# Altium PCB OLD-motordriver-v6.2.PcbDoc (part 1 of 2)
Units mil, origin at the board's own origin, x right, y up, seen from the top; angles counter-clockwise.
Board outline 3153.75 x 2790 mil, 4 copper layers (TOP, GND, POWER, BOT), stack 23.756 mil thick; 192 components, 82 nets, 493 pads, 611 vias.
Unrouted connection lines stored in the file: 13.
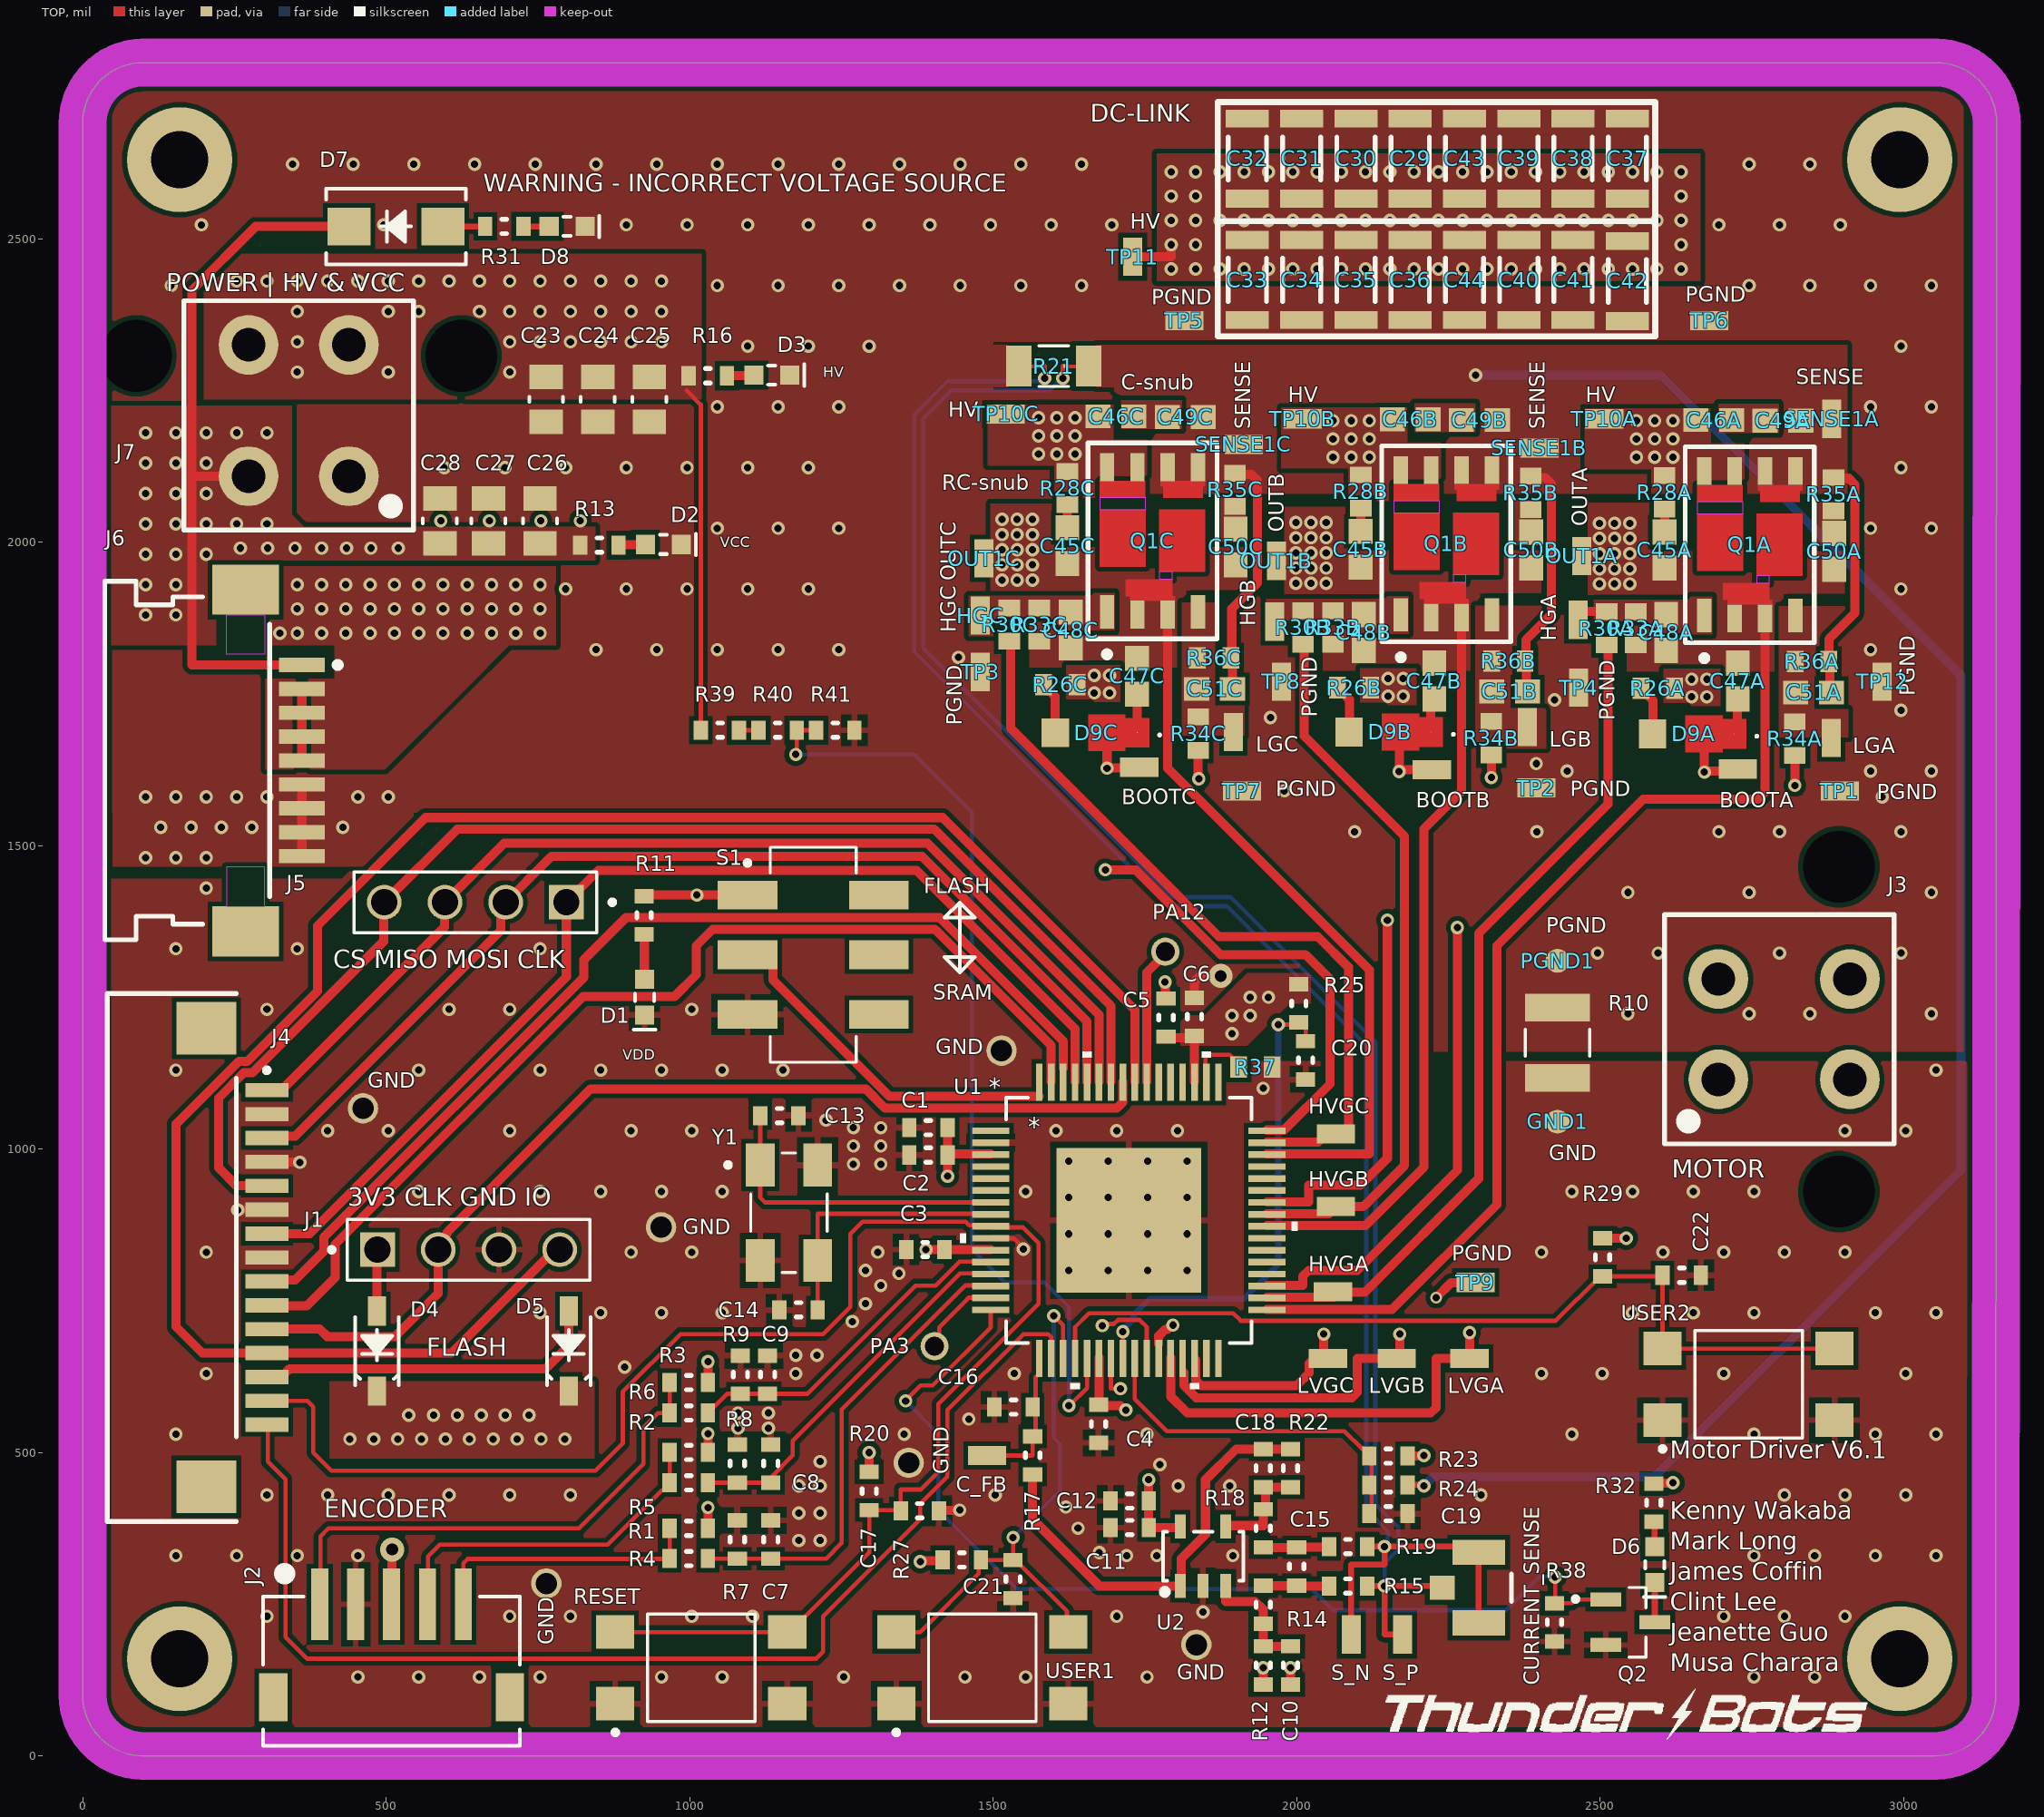
[diagram p0: TOP view]
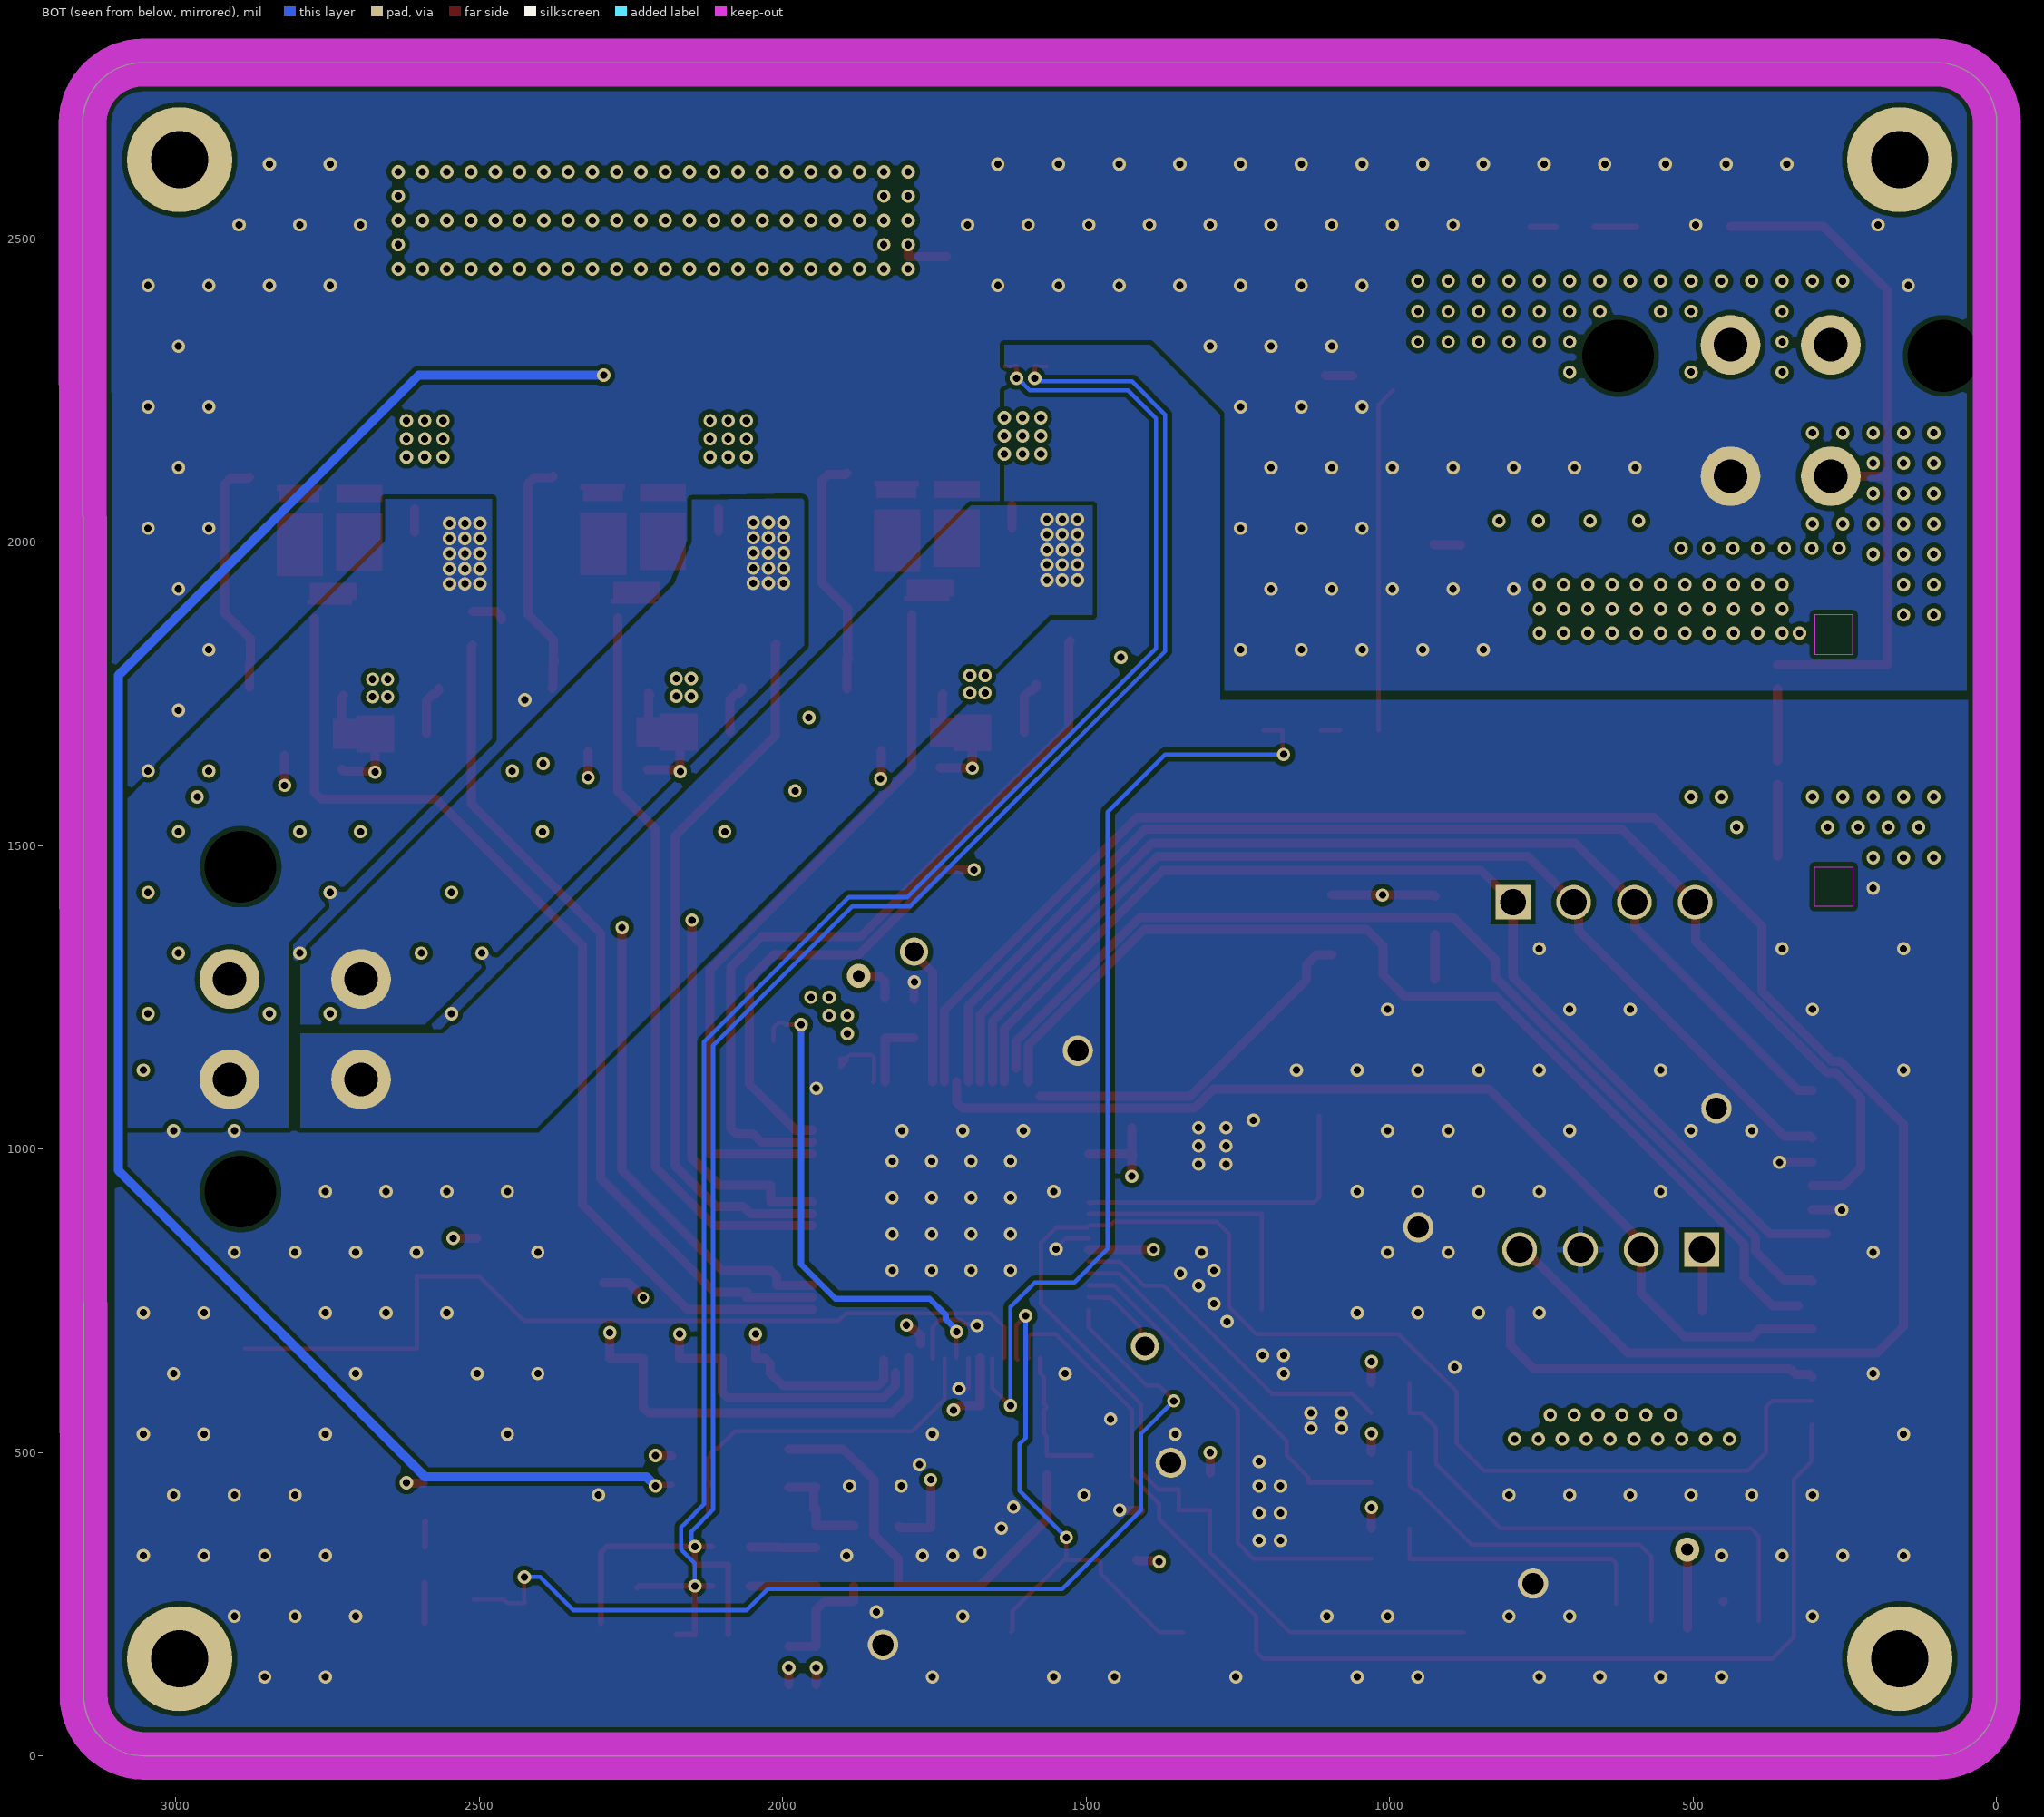
[diagram p1: BOT view, seen from below]
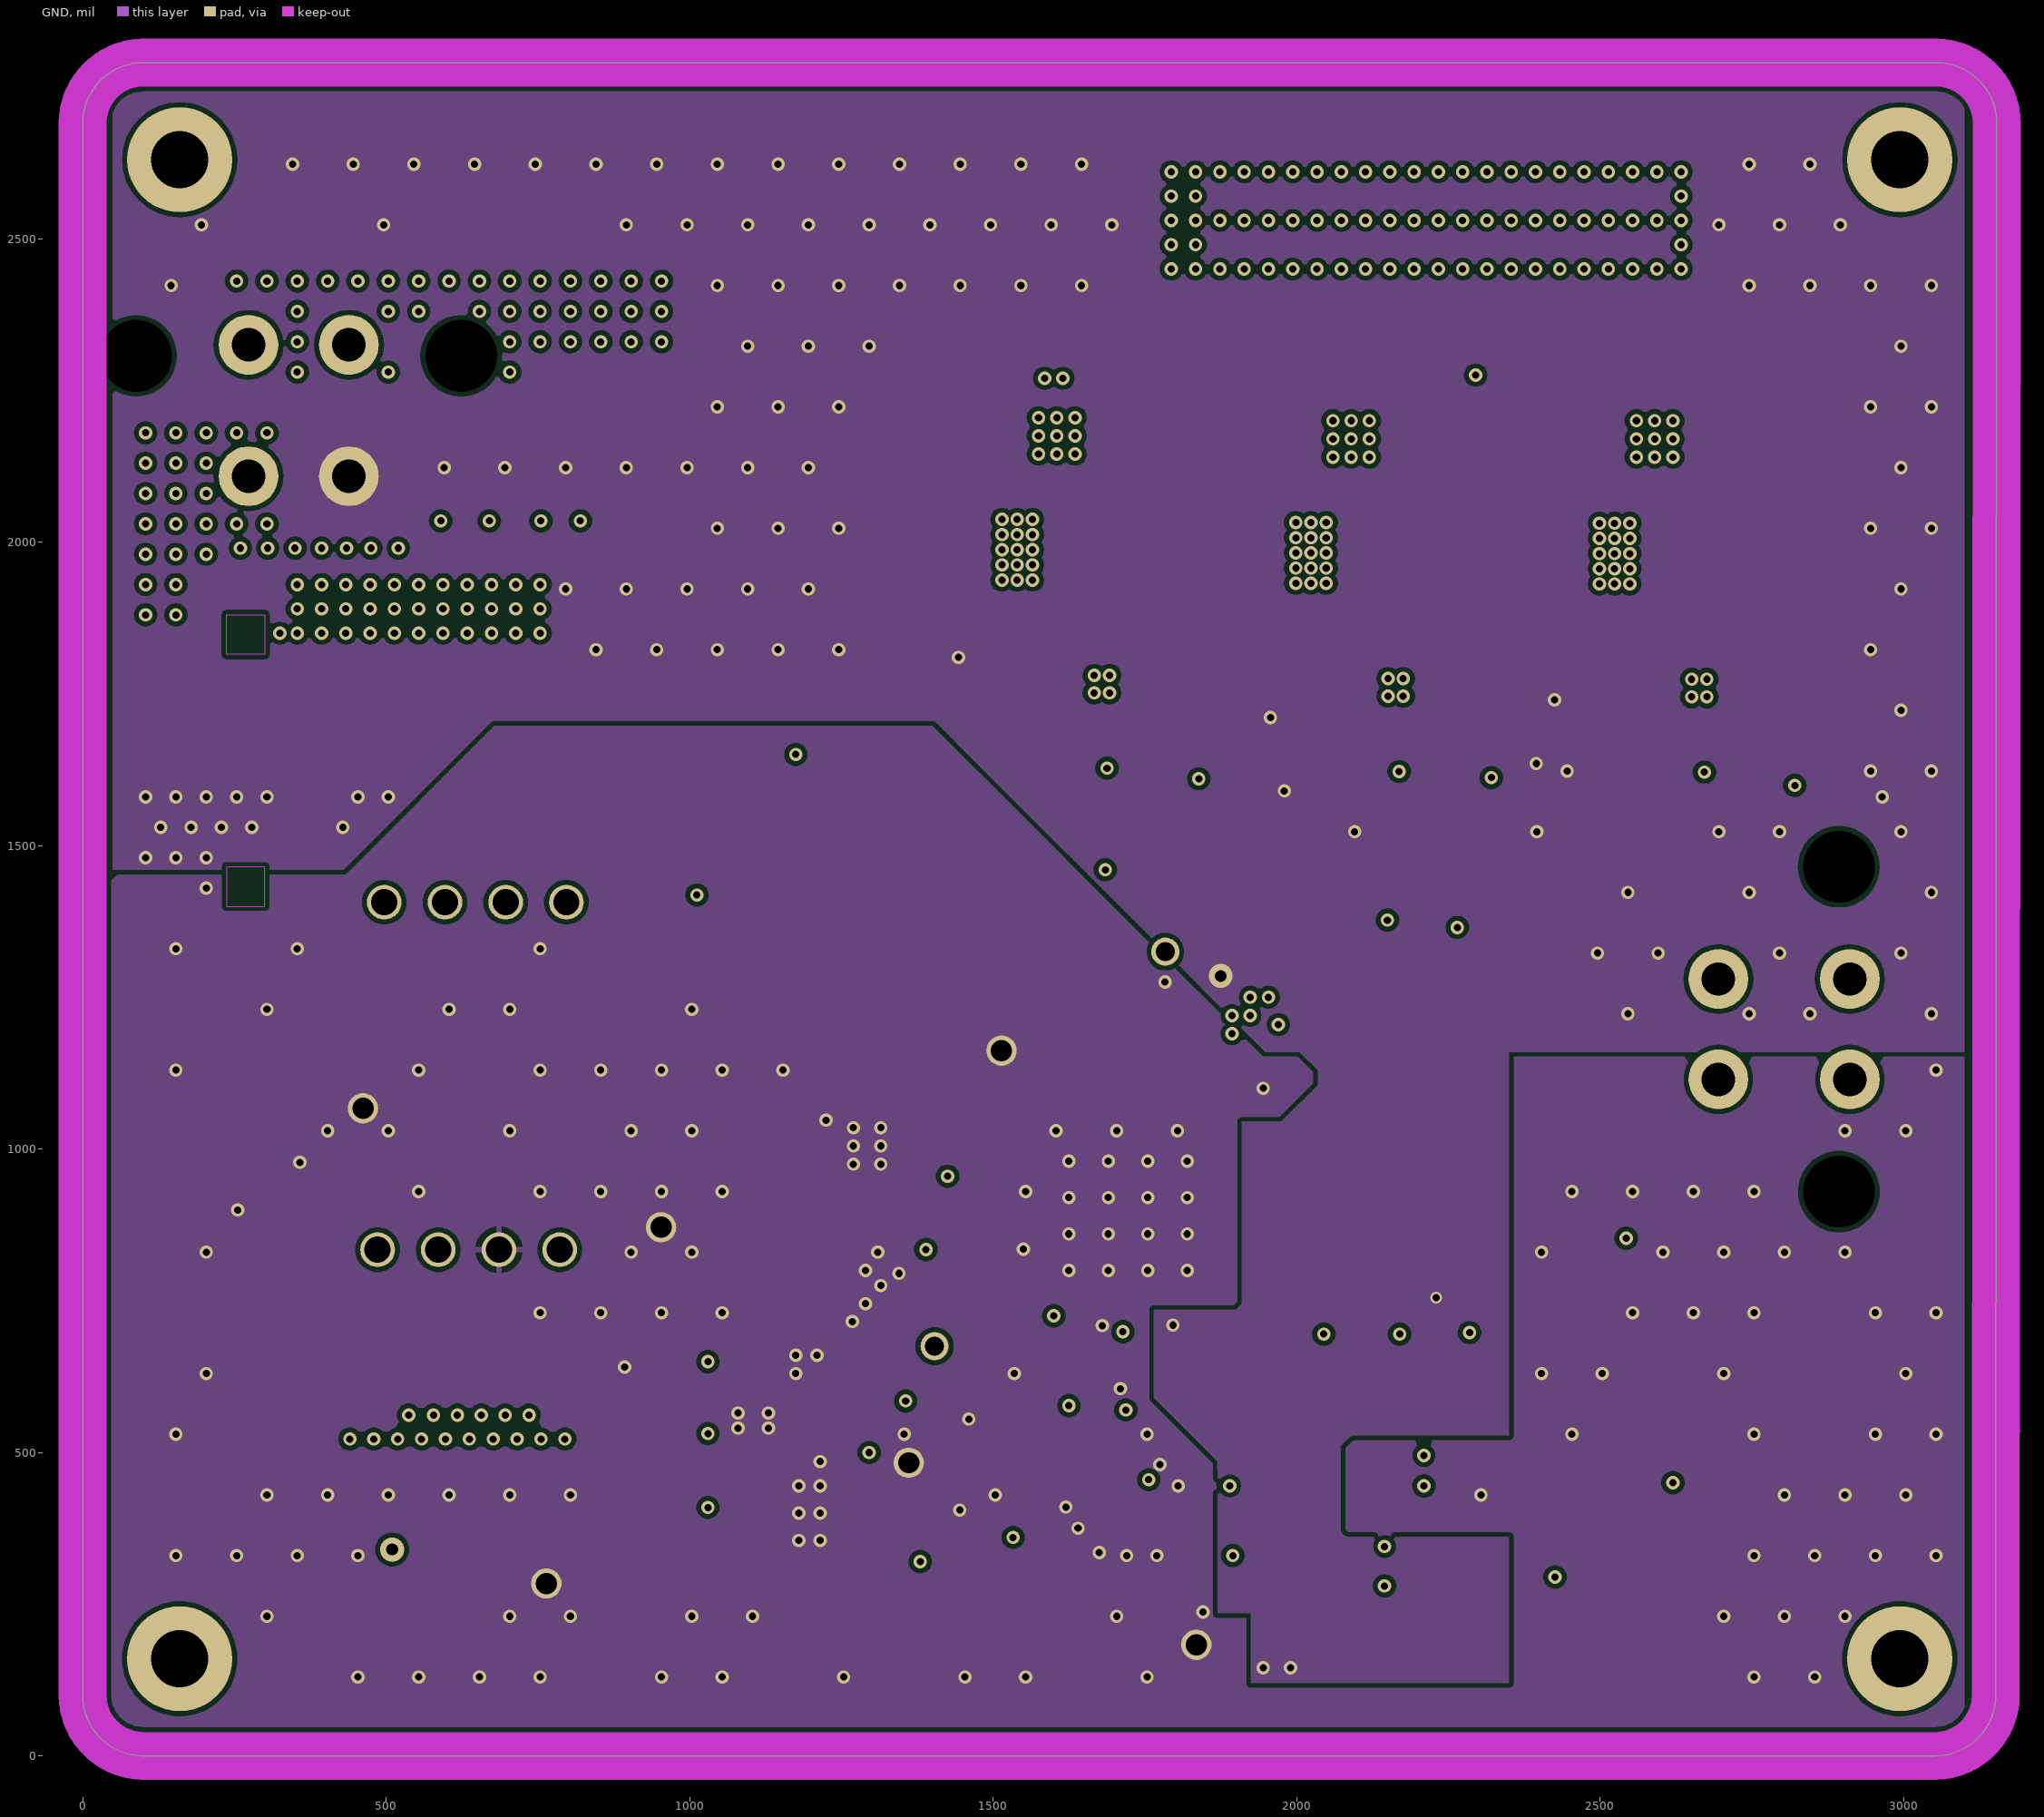
[diagram p2: GND]
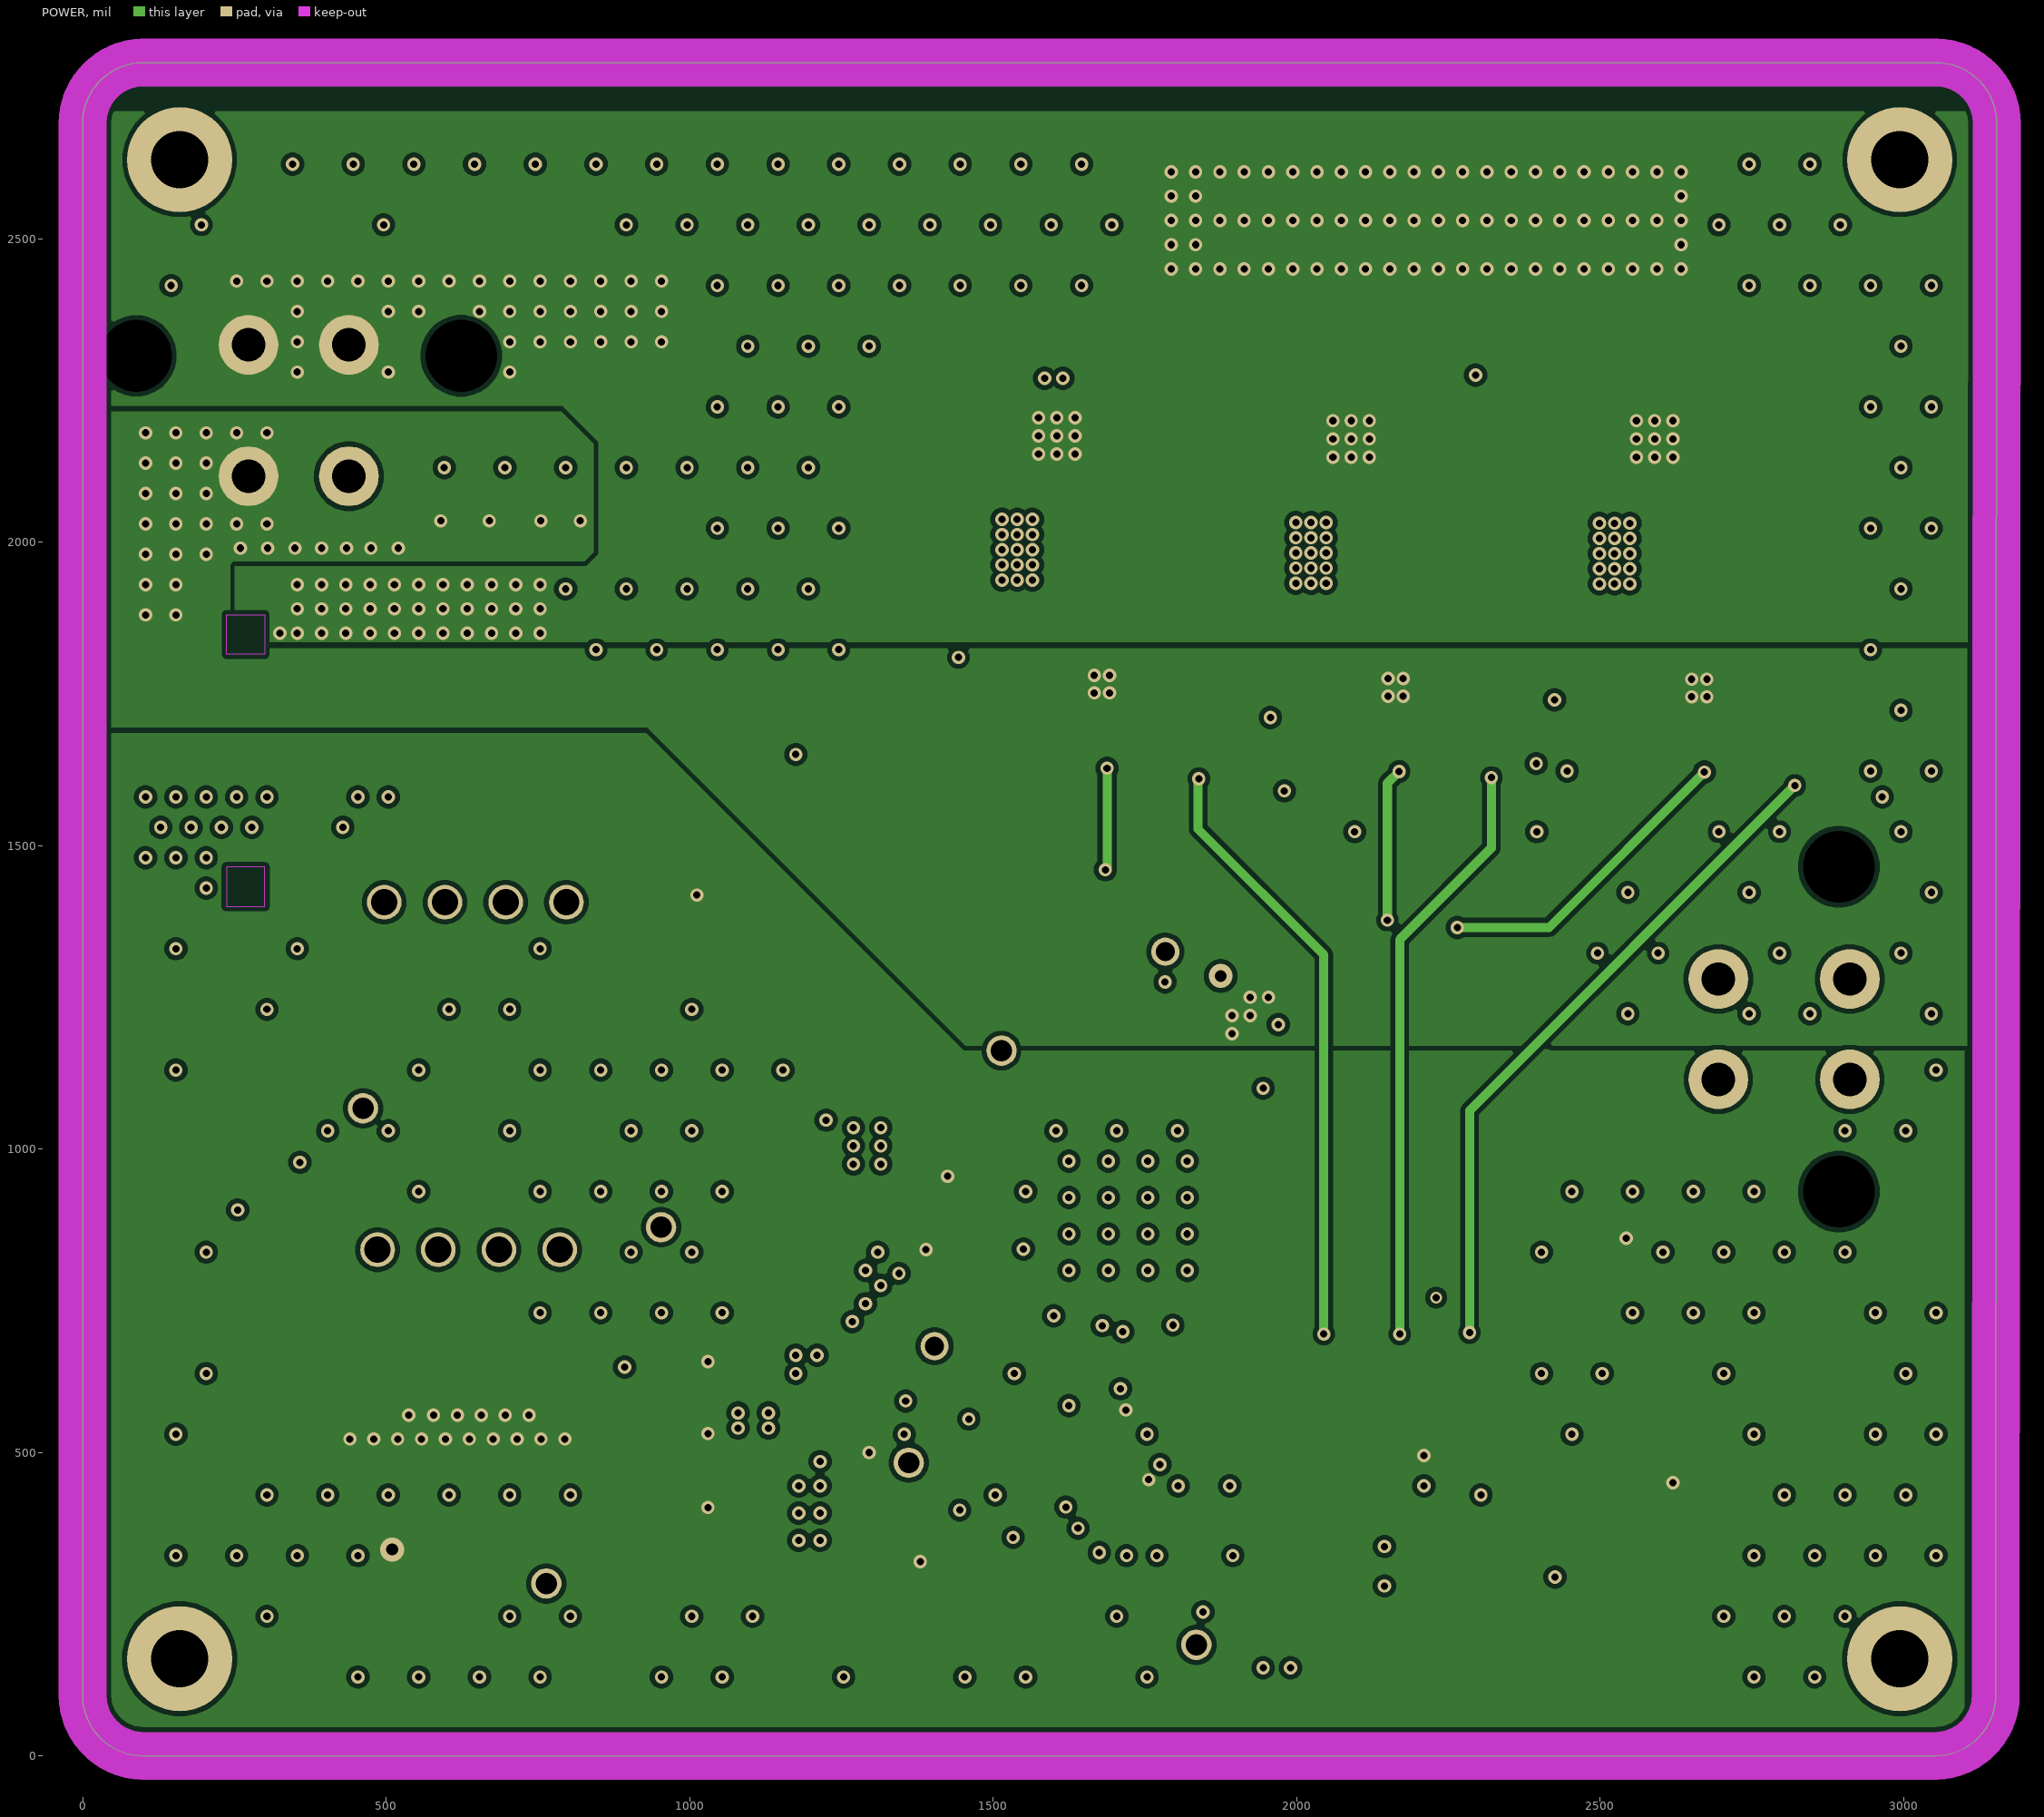
[diagram p3: POWER]
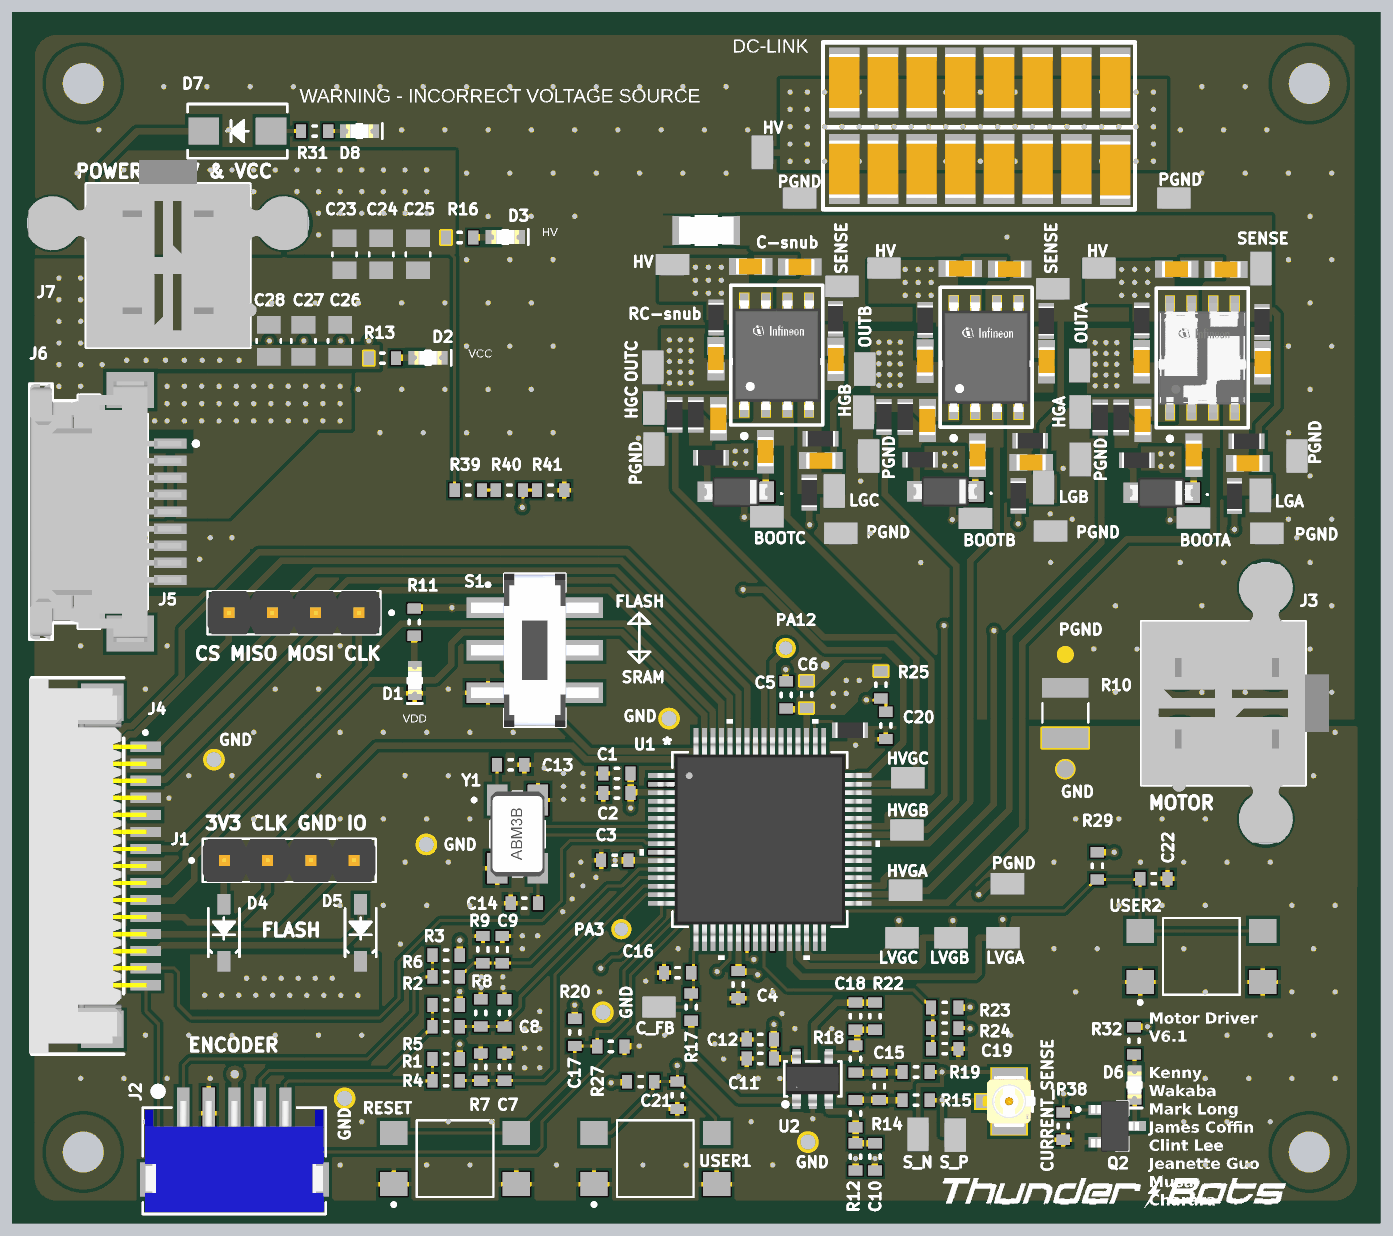
[diagram p5: 3D render of the assembled board from above, using the file's embedded part models]

## Layer stack, top to bottom
Top Solder: solder mask 0.4, Solder Resist, Dk 3.5
TOP: signal copper 1.4
Dielectric 2: prepreg 2.8, PP-006, Dk 4.1
GND: signal copper 1.378
Dielectric 1: dielectric 12.6, FR-4, Dk 4.8
POWER: signal copper 1.378
Dielectric 3: prepreg 2.8, PP-006, Dk 4.1
BOT: signal copper 1.4
Bottom Solder: solder mask 0.4, Solder Resist, Dk 3.5

## Board outline
0,100 0,2690 -0.02,2690 cw(c99.98,2690) 99.98,2790 3053.72,2790 cw(c3053.72,2690) 3153.72,2690 3151.99,100 3151.96,100 cw(c3051.96,100) 3051.96,0 100,0 cw(c100,100)

## Design rules (kind name [scope] priority, off if disabled: settings)
BoardOutlineClearance [All] p1: gap=7.87 ignorepadtopadclearanceinfootprint=FALSE except(15.75: Arc-SplitBarrior Arc-SplitContinuation Track-SplitBarrior Track-SplitContinuation SMDPad-SplitBarrior SMDPad-SplitContinuation THPad-SplitBarrior THPad-SplitContinuation Via-SplitBarrior Via-SplitContinuation Fill-SplitBarrior Fill-SplitContinuation Poly-SplitBarrior Poly-SplitContinuation Region-SplitBarrior Region-SplitContinuation Text-SplitBarrior Text-SplitContinuation)
Clearance "Clearance Bottom Layer" [OnLayer('Bottom Layer')] p1: gap=8 ignorepadtopadclearanceinfootprint=TRUE except(10: Arc-Text Track-Text SMDPad-Text THPad-Text Via-Text Fill-Text Poly-Text Region-Text Text-Text)
Clearance "Clearance Top Layer" [OnLayer('Top Layer')] p2: gap=8 ignorepadtopadclearanceinfootprint=TRUE except(10: Arc-Text Track-Text SMDPad-Text THPad-Text Via-Text Fill-Text Poly-Text Region-Text Text-Text)
Clearance [All] p3: gap=7.87 ignorepadtopadclearanceinfootprint=FALSE except(4: Arc-Arc Arc-Track Arc-SMDPad Track-Track Track-SMDPad SMDPad-SMDPad; 5: Arc-Via Track-Via SMDPad-Via THPad-Via Via-Via; 10: Arc-Text Track-Text SMDPad-Text THPad-Text Via-Text Fill-Text Poly-Text Region-Text Text-Text)
DiffPairsRouting [All] p1: maxlimit=10 minlimit=8 mostfreqgap=10 toplayer_minwidth=7 toplayer_maxwidth=15 toplayer_prefwidth=15 midlayer1_minwidth=7 midlayer1_maxwidth=15 midlayer1_prefwidth=15 midlayer2_minwidth=7 midlayer2_maxwidth=15 midlayer2_prefwidth=15 bottomlayer_minwidth=7 bottomlayer_maxwidth=15 bottomlayer_prefwidth=15 maxuncoupledlength=500
HoleSize [All] p1: absolutevalues=TRUE maxlimit=248.03 minlimit=7.87 maxpercent=80.000 minpercent=20.000
MinimumAnnularRing MinimumAnnularRing_1 [All] p1: minimumring=10
MinimumSolderMaskSliver [All] p1: minsoldermaskwidth=3.94
PolygonConnect [All] p1: connectstyle=Direct reliefconductorwidth=10 reliefentries=4 polygonreliefangle="90 Angle" airgapwidth=10
RoutingCorners [All] p1: cornerstyle=Round minsetback=100 maxsetback=100
RoutingVias [All] p1: holewidth=19.68 width=39.37 viastyle="Through Hole" minholewidth=7.87 minwidth=17.72 maxholewidth=39.37 maxwidth=78.74
SilkToSilkClearance [All] p1: silktosilkclearance=3.94
SilkToSolderMaskClearance [IsPad] p1: minsilkscreentomaskgap=3.94 clearancetoexposedcopper=TRUE
SolderMaskExpansion [isVia] p1: expansion=4 istentingtop=TRUE
Width [All] p1: maxlimit=100 minlimit=3.5 preferedwidth=15
24 further rules are at their usual default settings.

## Classes and differential pairs
channel class inverter: Inverter1 Inverter2 Inverter3
component class Inverter3: BOOTC BOOTCC C45C C46C C47C C48C C49C C50C C51C D9C HGC HGCC HVC HVGC HVGCC LGC LGCC LVGC LVGCC OUT1C OUTCC Q1C R26C R28C R30C R33C R34C R35C R36C SENSE1C SENSEB TP10C
component class Inverter2: BOOTB BOOTCB C45B C46B C47B C48B C49B C50B C51B D9B HGB HGCB HVB HVGB HVGCB LGB LGCB LVGB LVGCB OUT1B OUTCB Q1B R26B R28B R30B R33B R34B R35B R36B SENSE1B SENSEB TP10B
component class Inverter1: BOOTA BOOTCA C45A C46A C47A C48A C49A C50A C51A D9A HGA HGCA HVA HVGA HVGCA LGA LGCA LVGA LVGCA OUT1A OUTCA Q1A R26A R28A R30A R33A R34A R35A R36A SENSE1A SENSEA TP10A
component class STSPIN: C1 C2 C3 C4 C5 C6 C7 C8 C9 C10 C11 C12 C13 C14 C15 C16 C17 C18 C19 C20 C21 C22 C29 C30 C31 C32 C33 C34 C35 C36 C37 C38 C39 C40 C41 C42 C43 C44 C_FB CURRENT_SENSE D1 D2 D3 D6 GND1 HVC PA3 PA12 PGND1 Q2 R1 R2 R3 R4 R5 R6 R7 R8 R9 R10 R11 R12 R13 R14 R15 R16 R17 R18 R19 R20 R21 R22 R23 R24 R25 R27 R29 R32 R37 R38 R39 R40 R41 Reset RESET S1 S_N S_P TP1 TP2 TP3 TP4 TP5 TP6 TP7 TP8 TP9 TP11 TP12 U1 U2 USER1 USER2 Y1
component class "Power, Hall Sensor, Motor Connectors": C23 C24 C25 C26 C27 C28 D4 D5 D7 D8 J1 J2 J3 J4 J5 J6 J7 R31
differential pair SENSE: +SENSE_P -SENSE_N
differential pair SENSE_F: +SENSE_F_P -SENSE_F_N

## Components (designator, comment, footprint, x,y, rotation, side; value= is the part's Value field where it differs from the comment)
BOOTA "RCT-0C" RCT-0C-Footprint-1#1 2727,1626 r270 top (schematic designator BOOT)
BOOTB "RCT-0C" RCT-0C-Footprint-1#1 2223,1625 r270 top (schematic designator BOOT)
BOOTC "RCT-0C" RCT-0C-Footprint-1#1 1741,1629 r270 top (schematic designator BOOT)
C1 "100nF" 0603#1 1393.5,1035 r0 top
C2 "100nF" 0603#1 1393.5,990 r0 top
C3 "100nF" 0603#1 1388.47,834.29 r0 top
C4 "100nF" 0603#1 1673.72,547.18 r90 top
C5 "100nF" 0603#1 1785,1216.5 r270 top
C6 "2200pF" 0603#2 1831.99,1217.68 r270 top
C7 "50pF 50V" 0603#1 1133.72,356.5 r270 top value=10nF
C8 "50pF 50V" 0603#1 1133.72,481.5 r270 top value=10nF
C9 "50pF 50V" 0603#1 1128.72,627.99 r270 top value=10nF
C10 "22pF" 0603#3 1990,149.02 r270 top
C11 "10uF" 0603#1 1725,376.28 r0 top
C12 "0.10uF" 0603#1 1725,420 r0 top
C13 "10pF" 0603#1 1147.98,1055 r180 top
C14 "10pF" 0603#1 1179.47,735 r0 top
C15 "330pF" 0603#2 2000.25,312.01 r270 top
C16 "220pF" 0603#1 1533.72,574.67 r0 top
C17 "3.3nF 16V" 0603#1 1379.5,404 r180 top value=10nF
C18 "22pF" 0603#1 1945,474.02 r270 top
C19 "1nF 50V" 0603#1 2151.28,399.02 r180 top value=10nF
C20 "0.047uF" 0603#1 2015,1146 r90 top
C21 "3.3nF 16V" 0603#1 1533,291.25 r90 top value=10nF
C22 "3.3nF 16V" 0603#1 2634.59,792 r180 top value=10nF
C23 "10uF" 0805 763.72,2235 r90 top
C24 "10uF" 0805 848.72,2235 r90 top
C25 "10uF" 0805 933.72,2235 r90 top
C26 "10uF" 0805 753.72,2035 r270 top
C27 "10uF" 0805 668.72,2035 r270 top
C28 "10uF" 0805 588.72,2035 r270 top
C29 "50V" "1206 IPC Class B" 2187.3,2631.93 r270 top value=10µF
C30 "50V" "1206 IPC Class B" 2097.87,2631.93 r270 top value=10µF
C31 "50V" "1206 IPC Class B" 2008.44,2631.93 r270 top value=10µF
C32 "50V" "1206 IPC Class B" 1919.02,2631.93 r270 top value=10µF
C33 "50V" "1206 IPC Class B" 1919.02,2431.93 r90 top value=10µF
C34 "50V" "1206 IPC Class B" 2008.45,2431.93 r90 top value=10µF
C35 "50V" "1206 IPC Class B" 2097.87,2431.93 r90 top value=10µF
C36 "50V" "1206 IPC Class B" 2187.3,2431.93 r90 top value=10µF
C37 "50V" "1206 IPC Class B" 2545,2631.93 r270 top value=10µF
C38 "50V" "1206 IPC Class B" 2455.57,2631.93 r270 top value=10µF
C39 "50V" "1206 IPC Class B" 2366.15,2631.93 r270 top value=10µF
C40 "50V" "1206 IPC Class B" 2366.15,2431.93 r90 top value=10µF
C41 "50V" "1206 IPC Class B" 2455.57,2431.93 r90 top value=10µF
C42 "50V" "1206 IPC Class B" 2545,2430 r90 top value=10µF
C43 "50V" "1206 IPC Class B" 2276.72,2631.93 r270 top value=10µF
C44 "50V" "1206 IPC Class B" 2276.72,2431.93 r90 top value=10µF
C45A "Ceramic Capacitor 0603 Temp" "0603 IPC Class B"#1 2606.47,1987 r90 top (schematic designator C45)
C45B "Ceramic Capacitor 0603 Temp" "0603 IPC Class B"#1 2105.82,1988.12 r90 top (schematic designator C45)
C45C "Ceramic Capacitor 0603 Temp" "0603 IPC Class B"#1 1622.53,1994 r90 top (schematic designator C45)
C46A "Ceramic Capacitor 0.22uF +/-10% 50V 0603" "0603 IPC Class B"#1 2687.46,2201.06 r180 top value=220nF (schematic designator C46)
C46B "Ceramic Capacitor 0.22uF +/-10% 50V 0603" "0603 IPC Class B"#1 2187.28,2202.18 r180 top value=220nF (schematic designator C46)
C46C "Ceramic Capacitor 0.22uF +/-10% 50V 0603" "0603 IPC Class B"#1 1702.51,2207.06 r180 top value=220nF (schematic designator C46)
C47A "Ceramic Capacitor 0.22uF +/-10% 50V 0603" "0603 IPC Class B"#1 2727,1771 r270 top value=220nF (schematic designator C47)
C47B "Ceramic Capacitor 0.22uF +/-10% 50V 0603" "0603 IPC Class B"#1 2227,1771 r270 top value=220nF (schematic designator C47)
C47C "Ceramic Capacitor 0.22uF +/-10% 50V 0603" "0603 IPC Class B"#1 1737,1779 r270 top value=220nF (schematic designator C47)
C48A "Ceramic Capacitor 0603 Temp" "0603 IPC Class B"#1 2609,1851 r90 top (schematic designator C48)
C48B "Ceramic Capacitor 0603 Temp" "0603 IPC Class B"#1 2111,1851 r90 top (schematic designator C48)
C48C "Ceramic Capacitor 0603 Temp" "0603 IPC Class B"#1 1628,1855 r90 top (schematic designator C48)
C49A "Ceramic Capacitor 0.22uF +/-10% 50V 0603" "0603 IPC Class B"#1 2801.47,2200 r180 top value=220nF (schematic designator C49)
C49B "Ceramic Capacitor 0.22uF +/-10% 50V 0603" "0603 IPC Class B"#1 2301.3,2201.12 r180 top value=220nF (schematic designator C49)
C49C "Ceramic Capacitor 0.22uF +/-10% 50V 0603" "0603 IPC Class B"#1 1816.53,2206 r180 top value=220nF (schematic designator C49)
C50A "Ceramic Capacitor 0603 Temp" "0603 IPC Class B"#1 2885.99,1984.83 r270 top (schematic designator C50)
C50B "Ceramic Capacitor 0603 Temp" "0603 IPC Class B"#1 2386.82,1986.94 r270 top (schematic designator C50)
C50C "Ceramic Capacitor 0603 Temp" "0603 IPC Class B"#1 1899.79,1992.06 r270 top (schematic designator C50)
C51A "Ceramic Capacitor 0603 Temp" "0603 IPC Class B"#1 2852,1752 r180 top (schematic designator C51)
C51B "Ceramic Capacitor 0603 Temp" "0603 IPC Class B"#1 2351,1754 r180 top (schematic designator C51)
C51C "Ceramic Capacitor 0603 Temp" "0603 IPC Class B"#1 1865,1758 r180 top (schematic designator C51)
C_FB "RCT-0C" RCT-0C-Footprint-1#1 1490,495 r90 top
CURRENT_SENSE "U.FL-R-SMT-1(10)" FP-U_FL-R-SMT-1_10-MFG 2300,277.19 r90 top
D1 "0603 2V" "0603 - LED"#1 926.03,1250 r270 top
D2 "0603 2V" "0603 - LED"#2 956.97,1996.03 r0 top
D3 "0603 3.2V" "0603 - LED"#2 1135.47,2275 r0 top
D4 "SM5817PL-TP" SOD-123 485,667 r90 top
D5 "SM5817PL-TP" SOD-123 801,667 r90 top
D6 "0603 2V" "0603 - LED"#1 2590,315 r270 top
D7 "SMAZ12-13-F" SMA_DIO-L 516.34,2520 r0 top
D8 "0603 2V" "0603 - LED"#2 798.17,2520 r0 top
D9A "PMEG4010EXEX" PMEG4010EXEX 2654,1684 r180 top (schematic designator D9)
D9B "PMEG4010EXEX" PMEG4010EXEX 2154,1687 r180 top (schematic designator D9)
D9C "PMEG4010EXEX" PMEG4010EXEX 1670,1686 r180 top (schematic designator D9)
GND1 "Testpoint" TP_1mm#1 2430,1045 r0 top
HGA "RCT-0C" RCT-0C-Footprint-1#1 2464,1872 r0 top (schematic designator HG)
HGB "RCT-0C" RCT-0C-Footprint-1#1 1964,1869 r180 top (schematic designator HG)
HGC "RCT-0C" RCT-0C-Footprint-1#1 1479,1879 r180 top (schematic designator HG)
HVGA "RCT-0C" RCT-0C-Footprint-1#1 2060,765 r90 top (schematic designator HVG)
HVGB "RCT-0C" RCT-0C-Footprint-1#1 2065,905 r270 top (schematic designator HVG)
HVGC "RCT-0C" RCT-0C-Footprint-1#1 2065,1025 r90 top (schematic designator HVG)
J1 "61300411121" WURTH_61300411121#1 636,834 r0 top
J2 "S5B-ZR-SM4A-TF" JST_S5B-ZR-SM4A-TF 627.17,250 r180 top
J3 "39299044" 39299044 2695,1114.65 r270 top
J4 "ZF1-15-01-X-WT-XX" SAMTEC_ZF1-15-01-X-WT-XX 304,821.22 r270 top
J5 "61300411121" WURTH_61300411121#2 647,1406.5 r180 top
J6 "52207-0960" MOLX-52207-0960 315,1640 r270 top
J7 "39299044" 39299044 438.72,2108.46 r0 top locked
LGA "RCT-0C" RCT-0C-Footprint-1#1 2881,1677 r180 top (schematic designator LG)
LGB "RCT-0C" RCT-0C-Footprint-1#1 2380,1695 r180 top (schematic designator LG)
LGC "RCT-0C" RCT-0C-Footprint-1#1 1896,1687 r180 top (schematic designator LG)
LVGA "RCT-0C" RCT-0C-Footprint-1#1 2285,655 r90 top (schematic designator LVG)
LVGB "RCT-0C" RCT-0C-Footprint-1#1 2165,655 r90 top (schematic designator LVG)
LVGC "RCT-0C" RCT-0C-Footprint-1#1 2051.73,655 r90 top (schematic designator LVG)
OUT1A "RCT-0C" RCT-0C-Footprint-1#2 2463,1977 r180 top (schematic designator OUT1)
OUT1B "RCT-0C" RCT-0C-Footprint-1#1 1967,1969 r180 top (schematic designator OUT1)
OUT1C "RCT-0C" RCT-0C-Footprint-1#3 1477,1973 r180 top (schematic designator OUT1)
PA3 "Test Point (Via)" TP 1403.72,675 r90 top
PA12 "Test Point (Via)" TP 1783.72,1325 r90 top
PGND1 "Testpoint" TP_1mm#2 2430,1310 r0 top
Q1A "IAUC45N04S6N070H" IFX-PG-TDSON-8-57-V 2746.73,1995.68 r90 top (schematic designator Q1)
Q1B "IAUC45N04S6N070H" IFX-PG-TDSON-8-57-V 2246.82,1997.12 r90 top (schematic designator Q1)
Q1C "IAUC45N04S6N070H" IFX-PG-TDSON-8-57-V 1762.79,2002.06 r90 top (schematic designator Q1)
Q2 "TN2130K1-G" SOT95P237X112-3N 2550,220 r0 top
R1 "10k" 0603#2 998.72,375 r180 top
R2 "10k" 0603#2 998.72,500 r180 top
R3 "10k" 0603#2 998.72,615 r180 top
R4 "1.8k" 0603#2 998.72,325 r0 top
R5 "1.8k" 0603#2 998.72,450 r0 top
R6 "1.8k" 0603#2 998.72,565 r0 top
R7 "931R" 0603#3 1078.72,356.5 r90 top value=8.45k
R8 "931R" 0603#3 1078.72,481.5 r90 top value=8.45k
R9 "931R" 0603#3 1083.72,627.99 r90 top value=8.45k
R10 "JUMPER" 1210 2430,1175 r270 top value=0
R11 "110" 0603#2 925,1385 r90 top
R12 "5.83k" 0603#1 1945,149.02 r90 top value=8.45k
R13 "845R" 0603#2 851.5,1995 r180 top value=8.45k
R14 "100R" 0603#2 1945,249.02 r270 top value=8.45k
R15 "100R" 0603#2 2085,280 r180 top value=8.45k
R16 "1.87K" 0603#2 1030,2273.97 r180 top value=8.45k
R17 "100R" 0603#2 1565.22,495 r90 top value=8.45k
R18 "100R" 0603#2 1945,375 r90 top value=8.45k
R19 "100R" 0603#2 2085,345 r180 top value=8.45k
R20 "39k" 0603#2 1296,436.5 r270 top
R21 "RES 15m 1W" "1206 - Current Sense" 1600,2290 r180 top
R22 "5.83k" 0603#3 1990,474.02 r90 top value=8.45k
R23 "17.2k" 0603#2 2151.28,494.02 r180 top value=8.45k
R24 "2k" 0603#2 2151.28,446.52 r180 top
R25 "47k" 0603#2 2003.72,1240 r90 top
R26A "Resistor 10R +/-1% 250mW 0603" "0603 IPC Class B"#2 2595,1759 r0 top value=10 (schematic designator R26)
R26B "Resistor 10R +/-1% 250mW 0603" "0603 IPC Class B"#2 2094.82,1760.12 r0 top value=10 (schematic designator R26)
R26C "Resistor 10R +/-1% 250mW 0603" "0603 IPC Class B"#2 1610.79,1765.06 r0 top value=10 (schematic designator R26)
R27 "39k" 0603#2 1448.5,322.75 r0 top
R28A "Resistor 0603 Temp" "0603 IPC Class B"#2 2606.47,2082 r90 top (schematic designator R28)
R28B "Resistor 0603 Temp" "0603 IPC Class B"#2 2105.82,2083.12 r90 top (schematic designator R28)
R28C "Resistor 0603 Temp" "0603 IPC Class B"#2 1622.53,2089 r90 top (schematic designator R28)
R29 "39k" 0603#2 2504.08,821.5 r270 top
R30A "Resistor 10R +/-1% 250mW 0603" "0603 IPC Class B"#2 2511,1858 r90 top value=10 (schematic designator R30)
R30B "Resistor 10R +/-1% 250mW 0603" "0603 IPC Class B"#2 2010.82,1859.12 r90 top value=10 (schematic designator R30)
R30C "Resistor 10R +/-1% 250mW 0603" "0603 IPC Class B"#2 1526.79,1864.06 r90 top value=10 (schematic designator R30)
R31 "845R" 0603#2 694.85,2520 r0 top value=8.45k
R32 "110" 0603#2 2588.72,417.18 r90 top
R33A "Resistor 100k +/-1% 1/10W 0603" "0603 IPC Class B"#2 2559,1858 r90 top value=100k (schematic designator R33)
R33B "Resistor 100k +/-1% 1/10W 0603" "0603 IPC Class B"#2 2060,1859 r90 top value=100k (schematic designator R33)
R33C "Resistor 100k +/-1% 1/10W 0603" "0603 IPC Class B"#2 1576,1864 r90 top value=100k (schematic designator R33)
R34A "Resistor 10R +/-1% 250mW 0603" "0603 IPC Class B"#2 2821.04,1676.34 r90 top value=10 (schematic designator R34)
R34B "Resistor 10R +/-1% 250mW 0603" "0603 IPC Class B"#2 2321,1677 r90 top value=10 (schematic designator R34)
R34C "Resistor 10R +/-1% 250mW 0603" "0603 IPC Class B"#2 1837.89,1684.25 r90 top value=10 (schematic designator R34)
R35A "Resistor 0603 Temp" "0603 IPC Class B"#2 2884.73,2078.69 r270 top (schematic designator R35)
R35B "Resistor 0603 Temp" "0603 IPC Class B"#2 2385.71,2080.94 r270 top (schematic designator R35)
R35C "Resistor 0603 Temp" "0603 IPC Class B"#2 1898.79,2086.06 r270 top (schematic designator R35)
R36A "Resistor 100k +/-1% 1/10W 0603" "0603 IPC Class B"#2 2849,1803 r180 top value=100k (schematic designator R36)
R36B "Resistor 100k +/-1% 1/10W 0603" "0603 IPC Class B"#2 2349,1804 r180 top value=100k (schematic designator R36)
R36C "Resistor 100k +/-1% 1/10W 0603" "0603 IPC Class B"#2 1864,1809 r180 top value=100k (schematic designator R36)
R37 "Resistor 0R 0.1W 0603" "0603 IPC Class B"#2 1932.44,1135 r0 top value=0
R38 "10k" 0603#2 2425,220 r90 top
R39 "470k" 0603#2 1050,1690 r0 top
R40 "470k" 0603#2 1145,1690 r0 top
R41 "68k" 0603#2 1240,1690 r180 top
RESET "SW PUSH NO SMD" TL3305 1019.27,144.94 r90 top
S1 "JS202011SCQN" SW_JS202011SCQN 1203.72,1320 r270 top
S_N "RCT-0C" RCT-0C-Footprint-1#1 2090,200 r180 top
S_P "RCT-0C" RCT-0C-Footprint-1#1 2175,200 r0 top
SENSE1A "RCT-0C" RCT-0C-Footprint-1#1 2882,2203 r0 top (schematic designator SENSE1)
SENSE1B "RCT-0C" RCT-0C-Footprint-1#1 2400,2155 r90 top (schematic designator SENSE1)
SENSE1C "RCT-0C" RCT-0C-Footprint-1#1 1913,2161 r90 top (schematic designator SENSE1)
TP1 "RCT-0C" RCT-0C-Footprint-1#1 2895,1590 r90 top
TP2 "RCT-0C" RCT-0C-Footprint-1#1 2395,1595 r90 top
TP3 "RCT-0C" RCT-0C-Footprint-1#1 1479,1786 r0 top
TP4 "RCT-0C" RCT-0C-Footprint-1#1 2465,1760 r180 top
TP5 "RCT-0C" RCT-0C-Footprint-1#1 1815,2365 r90 top
TP6 "RCT-0C" RCT-0C-Footprint-1#1 2680,2365 r90 top
TP7 "RCT-0C" RCT-0C-Footprint-1#1 1910,1590 r90 top
TP8 "RCT-0C" RCT-0C-Footprint-1#1 1975,1770 r0 top
TP9 "RCT-0C" RCT-0C-Footprint-1#1 2295,780 r90 top
TP10A "RCT-0C" RCT-0C-Footprint-1#1 2507,2203 r90 top (schematic designator TP10)
TP10B "RCT-0C" RCT-0C-Footprint-1#1 2010,2203 r90 top (schematic designator TP10)
TP10C "RCT-0C" RCT-0C-Footprint-1#1 1521,2211 r90 top (schematic designator TP10)
TP11 "RCT-0C" RCT-0C-Footprint-1#1 1730,2470 r180 top
TP12 "RCT-0C" RCT-0C-Footprint-1#1 2965,1770 r0 top
U1 "STSPIN32F0251" TQFP64_10X10_STM-M 1723.72,882.43 r0 top
U2 "OPA356" SOT-23-5_MC_MCH-L 1808.72,280 r90 top
USER1 "SW PUSH NO SMD" TL3305 1482.27,144.94 r90 top
USER2 "SW PUSH NO SMD" TL3305 2744.73,612.06 r90 top
Y1 "ABM3B-8.000MHZ-10-1-U-T" XTAL_ABM3B-8.000MHZ-10-1-U-T 1163.72,895 r0 top

## Footprints (in the part's own frame and the unit in brackets; to place one, negate y for a bottom-side part, rotate by r counter-clockwise, add the part's x,y. Pads: shape width x height; smd on the part's side, far side on the other; paste and mask are expansions set on the pad)
0603#1 [mm] "Chip Resistor, 2-Leads, Body 1.60x0.80mm, IPC High Density"
  rect 0.6x0.8 smd mask+0.102: 1(-0.8,0)
  rect 0.6x0.8 smd mask+0.1: 2(0.8,0)
  silkscreen extent -0.1,-0.3 0.1,0.3, body extent -0.8,-0.4 0.8,0.4, height 0.6
0603#2 [mm] "Chip Resistor, 2-Leads, Body 1.60x0.80mm, IPC High Density"
  rect 0.6x0.8 smd mask+0.1: 1(-0.8,0) 2(0.8,0)
  silkscreen extent -0.1,-0.3 0.1,0.3, body extent -0.8,-0.4 0.8,0.4, height 0.6
0603#3 [mm] "Chip Resistor, 2-Leads, Body 1.60x0.80mm, IPC High Density"
  rect 0.6x0.8 smd mask+0.1: 1(-0.8,0)
  rect 0.6x0.8 smd mask+0.102: 2(0.8,0)
  silkscreen extent -0.1,-0.3 0.1,0.3, body extent -0.8,-0.4 0.8,0.4, height 0.6
"0603 - LED"#1 [mm]
  rect 0.8x0.8 smd: 1(-0.75,0)
  rect 0.8x0.8 smd mask+0.102: 2(0.75,0)
  silkscreen extent -0.15,-0.45 1.35,0.45, body extent -0.8,-0.4 0.8,0.4, height 0.65
"0603 - LED"#2 [mm]
  rect 0.8x0.8 smd: 1(-0.75,0) 2(0.75,0)
  silkscreen extent -0.15,-0.45 1.35,0.45, body extent -0.8,-0.4 0.8,0.4, height 0.65
"0603 IPC Class B"#1 [mm] "Chip Capacitor, 2-Leads, IPC Medium Density"
  rect 1.05x1 smd: 1(-0.75,0) 2(0.75,0)
  body extent -0.87,-0.48 0.87,0.48, height 0.94
"0603 IPC Class B"#2 [mm]
  rect 0.7x0.9 smd: 1(-0.7,0) 2(0.7,0)
  body extent -0.85,-0.45 0.85,0.45, height 0.55
0805 [mil]
  rect 40x55 smd: 1(-37,0) 2(37,0)
  silkscreen extent -4,-28 4,28, body extent -47,-28 47,28, height 24
"1206 - Current Sense" [mm]
  rect 1.05x1.72 smd: 1(-1.46,0) 2(1.46,0)
  rect 0.152x0.152 smd mask+0.102: S1(-0.476,0) S2(0.476,0)
  TOP region: -0.935,-0.067 -0.552,-0.067 -0.552,0.086 -0.935,0.086
  TOP region: 0.935,0.086 0.553,0.086 0.553,-0.067 0.935,-0.067
  silkscreen extent -0.62,-0.85 0.62,0.85, body extent -1.6,-0.8 1.6,0.8, height 1.61
"1206 IPC Class B" [mm] "Chip Capacitor, 2-Leads, IPC Medium Density"
  rect 0.75x1.8 smd: 1(-1.675,0) 2(1.675,0)
  silkscreen extent -0.9,-0.8 0.9,0.8, body extent -1.7,-0.9 1.7,0.9, height 1.8
1210 [mm]
  rect 1.16x2.72 smd: 1(-1.475,0)
  rect 1.16x2.72 smd mask+0.102: 2(1.475,0)
  silkscreen extent -0.57,-1.35 0.57,1.35
39299044 [mm] "4 POS MOLEX VERT"
  round 2.5 hole 1.4: 1(0,0) 2(-4.2,0) 3(0,5.5) 4(-4.2,5.5)
  round 0 hole 3 unplated: MH1(-8.9,5.04) MH1(4.7,5.04)
  silkscreen extent -6.9,-2.25 2.7,7.35, body extent -10.29,-2.25 6.09,8.75, height 12.8
FP-U_FL-R-SMT-1_10-MFG [mm]
  rect 1x1.05 smd paste-1000 mask+0: 1(0,1.525)
  rect 1.05x2.2 smd paste-1000 mask+0: 2(-1.475,0) 3(1.475,0)
  silkscreen extent -0.58,-1.38 0.58,-1.38, body extent -2.1,-1.48 2.1,2.15, height 0.25
IFX-PG-TDSON-8-57-V [mm] "TDSON 8, 1.27mm pitch; 8 pin, 5.48 mm L X 5.15 mm W X 1 mm H body"
  rect 1.4x0.6 smd paste-0.3 mask+0: 1(-2.97,1.905) 4(-2.97,-1.905)
  rect 1.17x0.6 smd paste-0.3 mask+0: 2(-3.085,0.635) 3(-3.085,-0.635) 5(3.085,-1.905) 6(3.085,-0.635) 7(3.085,0.635) 8(3.085,1.905)
  TOP region: -2.5,-0.935 -2.31,-0.935 -2.31,-0.825 -1.61,-0.825 -1.61,1.125 -2.31,1.125 -2.31,0.935 -2.5,0.935
  TOP region: 2.5,0.3 1.815,0.3 1.8,0.3 1.8,2.205 2.5,2.205
  TOP region: 2.5,-2.205 2.27,-2.205 2.27,-2.095 1.8,-2.095 1.8,-0.445 2.27,-0.445 2.27,-0.335 2.5,-0.335
  TOP region: 1.3,2.205 1.3,0.285 -1.09,0.285 -1.09,2.205
  TOP region: -1.3,-2.205 -1.3,-0.285 1.3,-0.285 1.3,-2.205
  TOP keep-out region: 1.3,2.205 1.3,0.285 1.8,0.285 1.8,2.205
  TOP keep-out region: -1.608,-0.285 -1.608,-0.825 -1.298,-0.825 -1.298,-0.285
  silkscreen extent -4.87,-2.7 4.1,2.7, body extent -3.22,-2.7 3.22,2.71, height 1.01
JST_S5B-ZR-SM4A-TF [mil]
  rect 28x118 smd paste+0: 1(236.22,0) 3(118.11,0) 4(59.06,0) 5(0,0)
  rect 28x118 smd mask+4: 2(177.17,0)
  rect 47x79 smd: 6(-76.77,153.62) 7(312.99,153.62)
  silkscreen extent -93,-50 330,233, body extent -88,-28 325,228, height 146
MOLX-52207-0960 [mm] "FPC Connector, 9-Leads, Right Angle, Pitch 1.0 mm, Mated Height 2.7 mm, SMT"
  rect 0.6x1.9 smd: 1(-4,1.175) 2(-3,1.175) 3(-2,1.175) 4(-1,1.175) 5(0,1.175) 6(1,1.175) 7(2,1.175) 8(3,1.175) 9(4,1.175)
  rect 2.1x2.8 smd: MP1(-7.15,-1.175) MP2(7.15,-1.175)
  Keep-Out Layer region: 6.1,-0.375 4.45,-0.375 4.45,-1.975 6.1,-1.975
  Keep-Out Layer region: -6.1,-0.375 -4.45,-0.375 -4.45,-1.975 -6.1,-1.975
  silkscreen extent -7.5,-7.07 7.5,2.8, body extent -7.65,-7.07 7.65,1.83, height 2.71
PMEG4010EXEX [mil]
  round 1 smd: 1(-67.44,0)
  rect 45.28x47.24 smd: 2(67.44,0)
  TOP region: -87,-24 -87,24 -48,24 -48,30 13,30 13,-30 -48,-30 -48,-24
  silkscreen extent -106,2 -102,6, body extent -71,-35 74,35, height 35
RCT-0C-Footprint-1#1 [mm]
  rect 0.8x1.6 smd: 1(0,0)
  body extent -0.64,-1.03 0.64,0.97, height 1.46
RCT-0C-Footprint-1#2 [mm]
  rect 0.8x1.6 smd: 1(-0.178,0)
  body extent -0.64,-1.03 0.63,0.97, height 1.46
RCT-0C-Footprint-1#3 [mm]
  rect 0.8x1.6 smd: 1(-0.203,0)
  body extent -0.64,-1.03 0.64,0.97, height 1.46
SAMTEC_ZF1-15-01-X-WT-XX [mm]
  rect 0.6x1.8 smd: 01(-7,0) 02(-6,0) 03(-5,0) 04(-4,0) 05(-3,0) 06(-2,0) 07(-1,0) 08(0,0) 09(1,0) 10(2,0) 11(3,0) 12(4,0) 13(5,0) 14(6,0) 15(7,0)
  rect 2.2x2.5 smd: S1(-9.6,-2.54) S2(9.6,-2.54)
  silkscreen extent -11.05,-6.69 11.05,0.08, body extent -11.01,-6.83 11.01,0.08, height 3.03
SMA_DIO-L [mil]
  rect 70.84x62.17 smd paste+0 mask+0: 1(-77.62,0) 2(77.62,0)
  silkscreen extent -115,-62 115,62, body extent -110,-57 110,57, height 93
SOD-123 [mil]
  rect 48x30 smd: A(66,0) C(-66,0)
  silkscreen extent -56,-36 56,36
SOT95P237X112-3N [mm]
  rect 1.3x0.59 smd: 1(-1.025,0.95) 2(-1.025,-0.95) 3(1.025,0)
  silkscreen extent -2.39,-1.46 0.65,1.46, body extent -1.54,-1.5 1.29,1.5, height 1.2
SOT-23-5_MC_MCH-L [mil]
  rect 40x18 smd: 1(0,0) 2(0,-37.4) 3(0,-74.8) 4(98,-74.8)
  rect 40x18 smd mask+4: 5(98,0)
  silkscreen extent -15,-103 90,31, body extent -14,-98 112,24, height 57
SW_JS202011SCQN [mm]
  rect 1.2x2.5 smd: 1(-2.5,-2.75) 2(0,-2.75) 4(-2.5,2.75) 5(0,2.75) 6(2.5,2.75)
  rect 1.2x2.5 smd mask+0.102: 3(2.5,-2.75)
  silkscreen extent -4.5,-2.85 4.5,1.8, body extent -4.5,-3.75 4.5,3.75, height 5.51
TL3305 [mm] "TL3305 SPST-NO"
  rect 1.4x1.6 smd mask+0.102: 1(-1.5,3.6) 2(-1.5,-3.6)
  rect 1.4x1.6 smd: 3(1.5,3.6) 4(1.5,-3.6)
  silkscreen extent -2.8,-2.25 2.25,3.7
TP [mm] "Test point (40mil Standard)"
  round 1.181 hole 0.8: 1(0,0)
TP_1mm#1 [mm]
  round 1 smd mask+0.102: 1(0,0)
TP_1mm#2 [mm]
  round 1 smd paste-2: 1(0,0)
TQFP64_10X10_STM-M [mil]
  rect 61x11 smd paste+0 mask+0: 1(-227.5,147.64) 3(-227.5,108.27) 4(-227.5,88.58) 5(-227.5,68.9) 6(-227.5,49.21) 7(-227.5,29.53) 8(-227.5,9.84) 9(-227.5,-9.84) 11(-227.5,-49.21) 12(-227.5,-68.9) 13(-227.5,-88.58) 14(-227.5,-108.27) 15(-227.5,-127.95) 16(-227.5,-147.64) 33(227.5,-147.64) 34(227.5,-127.95) 35(227.5,-108.27) 36(227.5,-88.58) 37(227.5,-68.9) 38(227.5,-49.21) 39(227.5,-29.53) 40(227.5,-9.84) 41(227.5,9.84) 42(227.5,29.53) 43(227.5,49.21) 44(227.5,68.9) 45(227.5,88.58) 46(227.5,108.27) 47(227.5,127.95) 48(227.5,147.64)
  rect 61x11 smd mask+4: 2(-227.5,127.95) 10(-227.5,-29.53)
  rect 11x61 smd paste+0 mask+0: 17(-147.64,-227.5) 18(-127.95,-227.5) 19(-108.27,-227.5) 20(-88.58,-227.5) 21(-68.9,-227.5) 22(-49.21,-227.5) 24(-9.84,-227.5) 25(9.84,-227.5) 27(49.21,-227.5) 28(68.9,-227.5) 29(88.58,-227.5) 30(108.27,-227.5) 31(127.95,-227.5) 32(147.64,-227.5) 49(147.64,227.5) 50(127.95,227.5) 51(108.27,227.5) 52(88.58,227.5) 53(68.9,227.5) 54(49.21,227.5) 55(29.53,227.5) 56(9.84,227.5) 57(-9.84,227.5) 58(-29.53,227.5) 59(-49.21,227.5) 60(-68.9,227.5) 61(-88.58,227.5) 62(-108.27,227.5) 63(-127.95,227.5) 64(-147.64,227.5)
  rect 11x61 smd mask+4: 23(-29.53,-227.5) 26(29.53,-227.5)
  rect 238x238 smd mask+4: EPAD(0,0)
  silkscreen extent -278,-278 278,278, body extent -236,-236 236,236, height 47
WURTH_61300411121#1 [mm]
  rect 1.45x1.45 / inner round 1.45 / far side rect 1.45x1.45 hole 1.1: 01(-3.81,0)
  round 1.45 hole 1.1 mask+0.05: 02(-1.27,0) 04(3.81,0)
  round 1.45 hole 1.1 mask+0.102: 03(1.27,0)
  silkscreen extent -5.83,-1.27 5.08,1.27, body extent -5.08,-1.27 5.08,1.27, height 8.54
WURTH_61300411121#2 [mm]
  rect 1.45x1.45 / inner round 1.45 / far side rect 1.45x1.45 hole 1.1 mask+0.05: 01(-3.81,0)
  round 1.45 hole 1.1 mask+0.05: 02(-1.27,0) 03(1.27,0) 04(3.81,0)
  silkscreen extent -5.83,-1.27 5.08,1.27, body extent -5.08,-1.27 5.08,1.27, height 8.54
XTAL_ABM3B-8.000MHZ-10-1-U-T [mm]
  rect 1.2x1.8 smd: 1(-1.2,2) 3(1.2,-2)
  rect 1.2x1.8 smd mask+0.102: 2(-1.2,-2) 4(1.2,2)
  silkscreen extent -2.65,-2.5 1.6,2.5, body extent -1.59,-2.5 1.59,2.5, height 1.1

## Part data
BOOTA BOOTB BOOTC C_FB HGA HGB HGC HVGA HVGB HVGC LGA LGB LGC LVGA LVGB LVGC OUT1A OUT1B OUT1C S_N S_P SENSE1A SENSE1B SENSE1C TP1 TP2 TP3 TP4 TP5 TP6 TP7 TP8 TP9 TP10A TP10B TP10C TP11 TP12: library part CMP-024-000003-4, "Metal Foil, 0W, 0.05ohm, Surface Mount, 0805", Manufacturer Part Number 1=RCT-0C
C1 C2 C3 C4 C5: library part "CAP 100nF 50V", "Default Symbol for Capacitors", Manufacturer Part Number 1=CC0603KPX7R9BB104, Manufacturer Part Number 2=0805J0500104KJT, Rating=50V, Supplier Part Number 1=311-3567-1-ND, Temperature Coefficient=X7R, Tolerance=10%, Part Number="CAP 100nF 50V", Supplier 1=Digi-Key, Supplier 2=Digi-Key, Supplier Part Number 2=1608-1458-1-ND
C6: library part "CAP 2200pF 50V", "Default Symbol for Capacitors", Manufacturer Part Number 1=06035C222KAT2A, Manufacturer Part Number 2=CL21B222KBANNNC, Rating=50V, Supplier Part Number 1=478-1219-1-ND, Temperature Coefficient=X7R, Tolerance=10%, Part Number="CAP 2200pF 50V", Supplier 1=Digi-Key, Supplier 2=Digi-Key, Supplier Part Number 2=1276-1171-1-ND
C7 C8 C9: library part "CAP 50pF 50V", "50 pF ±5% 50V Ceramic Capacitor C0G, NP0 0603 (1608 Metric)", Operating Temperature="-55°C ~ 125°C", Package=0805, Rating=50V, Supplier Part Number 1=13-CC0603JRNPO9BN500CT-ND, Temperature Coefficient=X7R, Tolerance=10%, Supplier 1=Digikey
C10 C18: library part "CAP 22pF 50V", "Default Symbol for Capacitors", Rating=50V, Temperature Coefficient=X7R, Tolerance=10%, Part Number="CAP 22pF 50V"
C11: library part "CAP 10uF 16V", "CAP CER 10UF 16V X5R 0603/0805", Operating Temperature="-55°C ~ 85°C", Package=0603/0805, Rating=16V, Temperature Coefficient=X5R, Tolerance=10%, Part Number="CAP 10uF 16V"
C12: library part "CAP 0.10uF 16V", "CAP CER 0.10UF 16V X5R 0603", Operating Temperature="-55°C ~ 85°C", Package=0603/0805, Rating=16V, Temperature Coefficient=X5R, Tolerance=10%, Part Number="CAP 0.10uF 16V"
C13 C14: library part "CAP 10pF 50V", "Default Symbol for Capacitors", Rating=50V, Temperature Coefficient=X7R, Tolerance=10%, Part Number="CAP 10pF 50V"
C15: library part "CAP 330pF 50V", "Default Symbol for Capacitors", Rating=50V, Temperature Coefficient=X7R, Tolerance=10%, Part Number="CAP 330pF 50V"
C16: library part "CAP 220pF 16V", "Default Symbol for Capacitors", Rating=16V, Temperature Coefficient=X5R, Tolerance=10%, Part Number="CAP 220pF 16V"
C17 C21 C22: library part "CAP 3.3nF 16V", "CAP CER 0603 3.3NF 16V X7R 10%", Operating Temperature="-55°C ~ 125°C", Package=0805, Rating=50V, Supplier Part Number 1=80-C0603C332K4RECLR, Temperature Coefficient=X7R, Tolerance=10%, Supplier 1=Mouser
C19: library part "CAP 1nF 50V", "CAP CER 0603 1NF 50V X7R 10%", Operating Temperature="-55°C ~ 125°C", Package=0805, Rating=50V, Supplier Part Number 1=80-C0603X102K5R3316, Temperature Coefficient=X7R, Tolerance=10%, Supplier 1=Mouser
C20: library part "CAP 0.047uF 16V", "Default Symbol for Capacitors", Rating=16V, Temperature Coefficient=X5R, Tolerance=10%, Part Number="CAP 0.047uF 16V"
C23 C24 C25 C26 C27 C28: library part "CAP 10uF 50V", "Default Symbol for Capacitors", Manufacturer Part Number 1=GRM21BR61H106KE43L, Manufacturer Part Number 2=CL32B106KBJNNWE, Rating=50V, Supplier Part Number 1=490-18663-1-ND, Temperature Coefficient=X5R, Tolerance=10%, Part Number="CAP 10uF 50V", Supplier 1=Digi-Key, Supplier 2=Digi-Key, Supplier Part Number 2=1276-3388-1-ND
C29 C30 C31 C32 C33 C34 C35 C36 C37 C38 C39 C40 C41 C42 C43 C44: library part CMP-001-00223-1, "Ceramic Capacitor, Multilayer, Ceramic, 50V, 10% +Tol, 10% -Tol, X7R, 15% TC, 10uF, Surface Mount, 1206", Capacitor Type=Ceramic, Case/Package=1206, Max Operating Temperature=125°C, Min Operating Temperature=-55°C, Mounting Technology="Surface Mount", Pins=2, RoHS Compliant=Yes
C45A C45B C45C C48A C48B C48C C50A C50B C50C C51A C51B C51C: library part CMP-001-00218-3, "Template for 0603 ceramic capacitor", Capacitor Type=Ceramic, Case/Package=0603, Mounting Technology=SM, Pins=2
C46A C46B C46C C47A C47B C47C C49A C49B C49C: library part CMP-001-00222-1, "Ceramic Capacitor, Multilayer, Ceramic, 50V, 10% +Tol, 10% -Tol, X7R, 15% TC, 0.22uF, Surface Mount, 0603", Capacitor Type=Ceramic, Case/Package=0603, Max Operating Temperature=125°C, Min Operating Temperature=-55°C, Mounting Technology="Surface Mount", Pins=2, RoHS Compliant=Yes
CURRENT_SENSE: library part CMP-024-000004-1, "RF Connector, 1 Contact(s), Male, Board Mount, Surface Mount Terminal, Receptacle"
D1 D6: library part "LED GREEN SMD 0603", "Green 570nm LED Indication - Discrete 2V 0603 (1608 Metric)", Supplier Part Number 1=732-4980-1-ND, Supplier 1=Digikey
D2 D8: library part "LED RED SMD 0603", "Red 625nm LED Indication - Discrete 2V 0603 (1608 Metric)", Supplier Part Number 1=732-4978-1-ND, Supplier 1=Digikey
D3: library part "LED BLUE SMD 0603", "Blue 470nm LED Indication - Discrete 3.2V 0603 (1608 Metric)", Supplier Part Number 1=732-4966-1-ND, Supplier 1=Digikey
D4 D5: library part "DIODE SCHOTTKY 20V 1A", "Diode Schottky 20V 1A Surface Mount SOD-123FL", Current Rating=1A, Package=SOD-123, Voltage Rating=20V, ComponentLink1Description=digikey, ComponentLink1URL=https://www.digikey.ca/product-detail/en/on-semiconductor/MBR0540T1G/MBR0540T1GOSCT-ND/917967, Digikey=SM5817PL-TPMSCT-ND, Digikey Link=https://www.digikey.ca/product-detail/en/micro-commercial-co/SM5817PL-TP/SM5817PL-TPMSCT-ND/1793410, MF="Micro Commercial Co", MP=SM5817PL-TP, Part Number="DIODE SCHOTTKY 20V 1A", Pin Count=2, Supplier URL 1=https://www.digikey.ca/product-detail/en/on-semiconductor/MBR0540T1G/MBR0540T1GOSCT-ND/917967
D7: library part "DIODE ZENER 12V 1W", "Zener Diode 12 V 1 W ±5% Surface Mount SMA", Mfr_Name="Diodes Inc", Supplier Part Number 1=SMAZ12-FDICT-ND, Copyright="Copyright (C) 2021 Ultra Librarian. All rights reserved.", Digi-Key_Part_Number_1=SMAZ12-FDICT-ND, Digi-Key_Part_Number_2=SMAZ12-FDIDKR-ND, Digi-Key_Part_Number_3=SMAZ12-FDITR-ND, Manufacturer Part Number 1=SMAZ12-13-F, Manufacturer_Part_Number=SMAZ12-13-F, Part Number="DIODE ZENER 12V 1W", RefDes=RefDes, Supplier 1=Digi-Key, Supplier 2=Newark, Supplier 3=Digi-Key, Supplier Part Number 2=23T8541, Supplier Part Number 3=SMAZ12-FDICT-ND, Supplier URL 1=https://www.digikey.com/en/products/detail/SMAZ12-13-F/SMAZ12-FDICT-ND/725073?curr=usd&utm_campaign=buynow&utm_medium=aggregator&utm_source=octopart, Type=DEV
D9A D9B D9C: library part CMP-004-00061-3, "PMEG4010EXE-Q - 40 V", Manufacturer_Name=Nexperia, Datasheet Link=https://assets.nexperia.com/documents/data-sheet/PMEG4010EXE.pdf, Design Item ID=PMEG4010EXEX, Height=1mm, Manufacturer_Part_Number=PMEG4010EXEX, Source=SamacSys.SchLib
GND1 PGND1: library part TP_1MM, Part Number=TP_1MM
J1 J5: "Connector Header Through Hole 4 position 0.100 (2.54mm)", Package=None, Check_prices=https://www.snapeda.com/parts/61300411121/Wurth+Electronics+Inc./view-part/?ref=eda, MF="Wurth Electronics", MP=61300411121, SnapEDA_Link=https://www.snapeda.com/parts/61300411121/Wurth+Electronics+Inc./view-part/?ref=snap
J2: library part "CN 5POS JST ZR RA", "Connector Header Surface Mount, Right Angle 5 position 0.059\" (1.50mm)", Supplier Part Number 1=455-1696-1-ND, Manufacturer Part Number 1=S5B-ZR-SM4A-TF, Part Number="CN 5POS JST ZR RA", Pin Count=5, Supplier 1=Digi-Key, Supplier URL 1=https://www.digikey.ca/en/products/detail/jst-sales-america-inc/S5B-ZR-SM4A-TF-LF-SN/926603?s=N4IgTCBcDaICwFYEFoCMA2AnOtyByAIiALoC%2BQA
J3 J7: library part "CN HDR 4POS Molex 39299044 VERT", "Molex 39299044 4POS Minifit / dual row, vertical", Supplier Part Number 1=WM7336-ND, Manufacturer Part Number 1=39299044, Part Number="CN HDR 4POS Molex 39299044 VERT", Pin Count=4, Supplier 1=Digi-Key, Supplier URL 1=https://www.digikey.ca/en/products/detail/molex/0039299044/1624292?s=N4IgTCBcDaIOoFkDsBmFA2AtAOQCIgF0BfIA
J4: library part CMP-002-00627-2, "15 Position FFC Connector Contacts, Bottom 0.039 (1.00mm) Surface Mount, Right Angle", Case/Package=None, Availability=Warning, Check_prices=https://www.snapeda.com/parts/ZF1-15-01-T-WT-TR/Samtec/view-part/3472733/?ref=eda, Component Type=Standard, Design Item ID=ZF1-15-01-X-WT-XX, MF=Samtec, MP=ZF1-15-01-T-WT-TR, Pins=15, Price=None, Purchase-URL=https://pricing.snapeda.com/search/part/ZF1-15-01-T-WT-TR/?ref=eda, SnapEDA_Link=https://www.snapeda.com/parts/ZF1-15-01-T-WT-TR/Samtec/view-part/3472733/?ref=snap, Source=ZF1-15-01-X-WT-XX.SchLib
J6: library part CMP-1241-00181-1, "1.0 mm Pitch Easy-On(TM) Type FPC Connector, 2.7 mm Mated Height, Right Angle, ZIF, SMT, Top Contact, 9 Circuits, -30 to 85 degC, ELV and RoHS Compliant, Tape and Reel", Current (Max per Contact)=1A, Manufacturer=Molex, Voltage (Max)=125V, Circuits (Loaded)=9, ComponentLink1Description="Manufacturer URL", ComponentLink1URL=http://www.molex.com/molex/index.jsp, ComponentLink2Description=Datasheet, ComponentLink2URL=http://www.molex.com/webdocs/datasheets/pdf/en-us/0522070960_FFC_FPC_CONNECTORS.pdf, ComponentLink3Description="Package Specification", ComponentLink3URL=http://www.molex.com/pdm_docs/sd/522070960_sd.pdf, Contact Position=Top, Durability (mating cycles max)=30, Entry Angle="90degrees Angle", Mated Height=2.70mm, Material - Metal="Phosphor Bronze", Material - Plating Mating=Gold, Material - Plating Termination=Tin, Mounting Technology="Surface Mount", Number of Rows=1, Orientation="Right Angle", PackageDescription="9-Lead FPC Connector, Pitch 1.0 mm", PackageReference=52207-0960, PackageVersion="Rev. F, 03/2007", Packing="Tape and Reel", PartNumber=52207-0960, PCB Locator=No, PCB Retention=Yes, Pitch - Mating Interface=1.00mm, Pitch - Termination Interface=1.00mm, Polarized to PCB=Yes, RoHS=TRUE, Stackable=No
Q1A Q1B Q1C: "MOSFET 2N-CH 40V 45A 8TDSON", Manufacturer="Infineon Technologies", Manufacturer Order Number=IAUC45N04S6N070H, PackageReference=PG-TDSON-8-57
Q2: library part "MOSFET N-CH TN2130K1-G", "N-Channel 300 V 85mA (Tj) 360mW (Tc) Surface Mount TO-236AB (SOT23)", Mfr_Name=Microchip, Supplier Part Number 1=TN2130K1-GCT-ND, Copyright="Copyright (C) 2021 Ultra Librarian. All rights reserved.", Digi-Key_Part_Number_1=TN2130K1-GCT-ND, Digi-Key_Part_Number_2=TN2130K1-GDKR-ND, Digi-Key_Part_Number_3=TN2130K1-GTR-ND, Manufacturer Part Number 1=TN2130K1-G, Manufacturer_Part_Number=TN2130K1-G, Part Number="MOSFET N-CH TN2130K1-G", RefDes=RefDes, Supplier 1=Digi-Key, Supplier URL 1=https://www.digikey.com/en/products/detail/microchip-technology/TN2130K1-G/4902939, Type=DEV
R1 R2 R3 R38: library part "RES 10k 1/8W - 1%", "Default Resistor Symbol", Manufacturer Part Number 1=ERJ-H3GJ103V, Manufacturer Part Number 2=RMCF0805JT10K0, Package=0805, Power (Watts)=0.125W, Supplier Part Number 1=10-ERJ-H3GJ103VCT-ND, Tolerance=5%, Part Number="RES 10k 1/8W - 1%", Supplier 1=Digi-Key, Supplier 2=Digi-Key, Supplier Part Number 2=RMCF0805JT10K0CT-ND, Supplier URL 1=https://www.digikey.ca/en/products/detail/panasonic-electronic-components/ERJ-H3GJ103V/13877876?s=N4IgTCBcDaIIwAYC0BRASgKSQCQMwHENFcA1AYQBUkA5AERAF0BfIA, Supplier URL 2=https://www.digikey.ca/en/products/detail/stackpole-electronics-inc/RMCF0805JT10K0/1757762?s=N4IgTCBcDaIEoFkDCAxADADjQVgFIBUBGNAaTSXxAF0BfIA, Tolerance 2=5%
R4 R5 R6: library part "RES 1.8k 1/8W", "Default Resistor Symbol", Package=0805, Power (Watts)=0.125W, Tolerance=5%, Part Number="RES 1.8k 1/8W"
R7 R8 R9: library part "RES 931 1/10W 1%", "RES 931 OHM 1% 1/10W 0603", Package=0603, Power (Watts)=0.125W, Supplier Part Number 1=3610656, Tolerance=1%, Supplier 1="Future Electronics"
R10: library part "RES 0 JUMPER", "RES SMD 0 OHM JUMPER GENERIC 0603", Package=0805, Tolerance=N/A, Part Number="RES 0 JUMPER"
R11 R32: library part "RES 110.0 1/8W - 1%", "Default Resistor Symbol", Manufacturer Part Number 1=RMCF0603FT110R, Package=0805, Power (Watts)=0.125W, Supplier Part Number 1=RMCF0603FT110RCT-ND, Tolerance=1%, Part Number="RES 110.0 1/8W - 1%", Supplier 1=Digi-Key, Supplier URL 1=https://www.digikey.ca/en/products/detail/stackpole-electronics-inc/RMCF0603FT110R/1761268
R12 R22: library part "RES 5.83k 1/10W 0.1%", "RES 5.83K OHM 0.1% 1/10W 0603", Package=0603, Power (Watts)=0.125W, Supplier Part Number 1=2019-RN73H1JTTD5831B25CT-ND, Tolerance=1%, Supplier 1=Digikey
R13 R31: library part "RES 845 1/10W 1%", "RES 845 OHM 1% 1/10W 0603", Package=0603, Power (Watts)=0.125W, Supplier Part Number 1=7098270, Tolerance=1%, Supplier 1="Future Electronics"
R14 R15 R17 R18 R19: library part "RES 100R 1/10W 0.05%", "RES SMD 100 OHM 0.05% 1/10W 0603", Package=0603, Power (Watts)=0.125W, Supplier Part Number 1=RG16N100WCT-ND, Tolerance=1%, Supplier 1=Digikey
R16: library part "RES 1.87K 1/10W 1%", "RES 1.87K OHM 1% 1/10W 0603", Package=0603, Power (Watts)=0.125W, Supplier Part Number 1=2610988, Tolerance=1%, Supplier 1="Future Electronics"
R20 R27 R29: library part "RES 39k 1/8W", "Default Resistor Symbol", Manufacturer Part Number 1=CRGCQ0603F39K, Manufacturer Part Number 2=CRG0805F39K, Package=0805, Power (Watts)=0.125W, Supplier Part Number 1=A129707CT-ND, Tolerance=1%, Part Number="RES 39k 1/8W", Supplier 1=Digi-Key, Supplier 2=Digi-Key, Supplier Part Number 2=A126366CT-ND, Supplier URL 1=https://www.digikey.ca/en/products/detail/te-connectivity-passive-product/CRGCQ0603F39K/8576309?s=N4IgTCBcDaIIIEYwE4DsAGVBhAKiAugL5A, Supplier URL 2=https://www.digikey.ca/en/products/detail/te-connectivity-passive-product/CRG0805F39K/2380898?s=N4IgTCBcDaIIIEYwDYDMzkGEAqIC6AvkA, Tolerance 2=1%
R21: "1W 0.015 OHM METAL ALLOY CS 1% C 1206", Supplier Part Number 1=273-MCS1632R015DERCT-ND, ComponentLink1Description="New link", ComponentLink1URL=https://www.digikey.ca/en/products/detail/ohmite/MCS1632R015DER/22672431, Supplier 1=Digikey
R23: library part "RES 17.2k 1/10W 0.1%", "RES 17.2k OHM 0.1% 1/10W 0603", Package=0603, Power (Watts)=0.125W, Supplier Part Number 1=2019-RN73H1JTTD1722B25CT-ND, Tolerance=1%, Supplier 1=Digikey
R24: library part "RES 2k 1/8W", "Default Resistor Symbol", Package=0805, Power (Watts)=0.125W, Tolerance=5%, Part Number="RES 2k 1/8W"
R25: library part "RES 47k 1/8W - 1%", "Default Resistor Symbol", Manufacturer Part Number 1=MCT06030C4702FP500, Package=0805, Power (Watts)=0.125W, Supplier Part Number 1=MCT0603-47.0K-CFCT-ND, Tolerance=1%, Part Number="RES 47k 1/8W - 1%", Supplier 1=Digi-Key, Supplier URL 1=https://www.digikey.ca/en/products/detail/vishay-beyschlag-draloric-bc-components/MCT06030C4702FP500/2607854?s=N4IgTCBcDaILIGEAqAGAbCgzAWgCwHYA6FAaWwQDFlsA5AERAF0BfIA
R26A R26B R26C R30A R30B R30C R34A R34B R34C: library part CMP-009-00398-1, "SMD Chip Resistor, 10 Ohm, ± 1%, 250 mW, 0603 [1608 Metric], Thick Film, Anti-Surge", Case/Package=0603, Power=250mW, Pins=2
R28A R28B R28C R35A R35B R35C: library part CMP-009-00391-3, "Template for 0603 Resistor", Case/Package=0603, Pins=2
R33A R33B R33C R36A R36B R36C: library part CMP-009-00395-2, "Fixed Resistor, Metal Glaze/thick Film, 0.1W, 100000ohm, 75V, 1% +/-Tol, 100ppm/Cel, Surface Mount, 0603", Case/Package=0603, Max Operating Temperature=155°C, Min Operating Temperature=-55°C, Power=100mW, Tolerance=1%, Mounting Technology="Surface Mount", Pins=2, RoHS Compliant=Yes
R37: library part CMP-009-00399-1, "Fixed Resistor, Metal Glaze/thick Film, 0.1W, 0ohm, Surface Mount, 0603", Case/Package=0603, Max Operating Temperature=155°C, Min Operating Temperature=-55°C, Power=100mW, Mounting Technology="Surface Mount", Pins=2, RoHS Compliant=Yes
R39 R40: library part "RES 470k 1/8W", "Default Resistor Symbol", Package=0805, Power (Watts)=0.125W, Tolerance=5%, Part Number="RES 470k 1/8W"
R41: library part "RES 68k 1/8W", "Default Resistor Symbol", Package=0805, Power (Watts)=0.125W, Tolerance=5%, Part Number="RES 68k 1/8W"
RESET USER1 USER2: "Switch Tactile N.O. SPST Round Button Gull Wing 0.05A 12VDC 2.55N SMD T/R", Manufacturer Part Number 1="TL3305BF260QG / TL3305BF260QG", Supplier Part Number 1=EG5354CT-ND, Part Number="SW PUSH NO SMD", Supplier 1=Digi-Key, Supplier URL 1=https://www.digikey.ca/en/products/detail/e-switch/TL3305BF260QG/5816185?s=N4IgTCBcDaIKIHECsBmJAWAwgFQLQDkAREAXQF8g
S1: "SWITCH SLIDE DPDT 300MA 6V", Package=None, Availability=Unavailable, MP=JS202011SCQN, Price=None
U1: "No Description Available", Mfr_Name=STMicroelectronics, RefDes=RefDes, Type=Type
U2: "IC OPAMP VFB 1 CIRCUIT SOT23-5", Manufacturer="Analog Devices", Manufacturer Part Number=ADA4505-1ARJZ-R7, Max Operating Temperature=125°C, Supplier Part Number 1=595-OPA356AIDBVR, Category="Amplifiers - Op Amps, Buffer, Instrumentation", ComponentLink1Description=https://datasheet.ciiva.com/22712/1610797-22712032.pdf?src-supplier=Element14, ComponentLink1URL=https://datasheet.ciiva.com/22712/1610797-22712032.pdf?src-supplier=Element14, ComponentLink2Description=https://datasheet.ciiva.com/23805/608874-23805844.pdf?src-supplier=Newark, ComponentLink2URL=https://datasheet.ciiva.com/23805/608874-23805844.pdf?src-supplier=Newark, ComponentLink3Description=https://datasheet.ciiva.com/1487/1610797-1487372.pdf?src-supplier=Element14, ComponentLink3URL=https://datasheet.ciiva.com/1487/1610797-1487372.pdf?src-supplier=Element14, Digikey=ADA4505-1ARJZ-R7CT-ND, Number of Pins=5, REACH SVHC="No SVHC", RoHS=Yes, Supplier 1=Mouser
Y1: "8 MHz Â±10ppm Crystal 10pF 200 Ohms 4-SMD, No Lead", Package="SMD-4 Abracon LLC", Availability="In Stock", Check_prices=https://www.snapeda.com/parts/ABM3B-8.000MHZ-10-1-U-T/Abracon+LLC/view-part/?ref=eda, MF=Abracon, MP=ABM3B-8.000MHZ-10-1-U-T, Price=None, Purchase-URL=https://pricing.snapeda.com/search/part/ABM3B-8.000MHZ-10-1-U-T/?ref=eda, SnapEDA_Link=https://www.snapeda.com/parts/ABM3B-8.000MHZ-10-1-U-T/Abracon+LLC/view-part/?ref=snap
PA3 PA12: Part Number="Test Point (Via)"

## Free pads (board coordinates)
  round 50 hole 35: 2(462,1067) 2(764,284) 2(953,871) 2(1361,483) 2(1514,1162) 2(1835,183)
  round 173.23 hole 94.49 paste-99999 mask-173.23: ""(160,160)
  round 173.23 hole 94.49 mask-173.23: ""(160,2630) ""(2994,160) ""(2994,2630)

## Via types
v1: diameter 22, hole 12, TOP to BOT, tented both sides, 606 vias
v2: diameter 22/22/22/22 (per signal layer), hole 12, TOP to BOT, tented both sides, 2 vias
v3: diameter 39.37, hole 19.68, TOP to BOT, tented both sides, 2 vias
v4: diameter 20, hole 12, TOP to BOT, tented both sides, 1 vias

## Nets (pads, with @x,y where several pads share a name; then routed paths per layer and width w, separated by ;. In a path a pad name is that pad's centre, name@x,y a point inside that pad or via, vN(x,y) a via of type N, cw(c..) or ccw(c..) an arc to the next point about the centre after c; other vN are vias at no path point)
BOOT0: S1.2 U1.64 | length 591.9
  TOP w15: S1.2@1095.46,1320 1121.05,1320 1137.17,1303.88 1137.17,1278.99 1329.64,1086.53 U1.64@1576.09,1086.53
BOOTA: BOOTA.1 C47A.2 D9A.1 U1.35 | length 1507
  TOP w15: U1.35@1951.22,775.24 2010,775.24 2010,790 2020,800 2100,800 2265,965 v1(2265,1365) ; 2670,1696 2672,1694 v1(2672,1621) 2673.34,1622.34 2723.34,1622.34 BOOTA.1@2727,1626 ; C47A.2@2724,1747.47 C47A.2@2725.44,1746.03 ; 2726.44,1686 C47A.2@2726.44,1744.03
  POWER w15: v1(2265,1365) 2416,1365 v1(2672,1621)
BOOTB: BOOTB.1 C47B.2 D9B.1 U1.42 | length 1078.9
  TOP w15: U1.42@1951.22,913.03 2020,913.03 2020,932.77 2020,940 2105,940 2149.72,984.72 v1(2149.72,1377) ; v1(2169,1622) 2170.89,1622 2173.89,1625 BOOTB.1@2223,1625 ; v1@2169.82,1622.82 2169.82,1697.12 ; C47B.2@2218.82,1748.12 C47B.2@2220.27,1746.68 ; 2221.27,1694.12 C47B.2@2221.27,1752.15
  POWER w15: v1(2149.72,1377) 2149.72,1602.72 v1(2169,1622)